# Altium PCB SensorHub_V1_2.PcbDoc (part 1 of 2)
Units mm, origin at the board's own origin, x right, y up, seen from the top; angles counter-clockwise.
Board outline 62.99 x 68.83 mm, 4 copper layers (Top Layer, Int1, Int2, Bottom Layer), stack 1.369 mm thick; 108 components, 90 nets, 414 pads, 145 vias.
Unrouted connection lines stored in the file: 31.
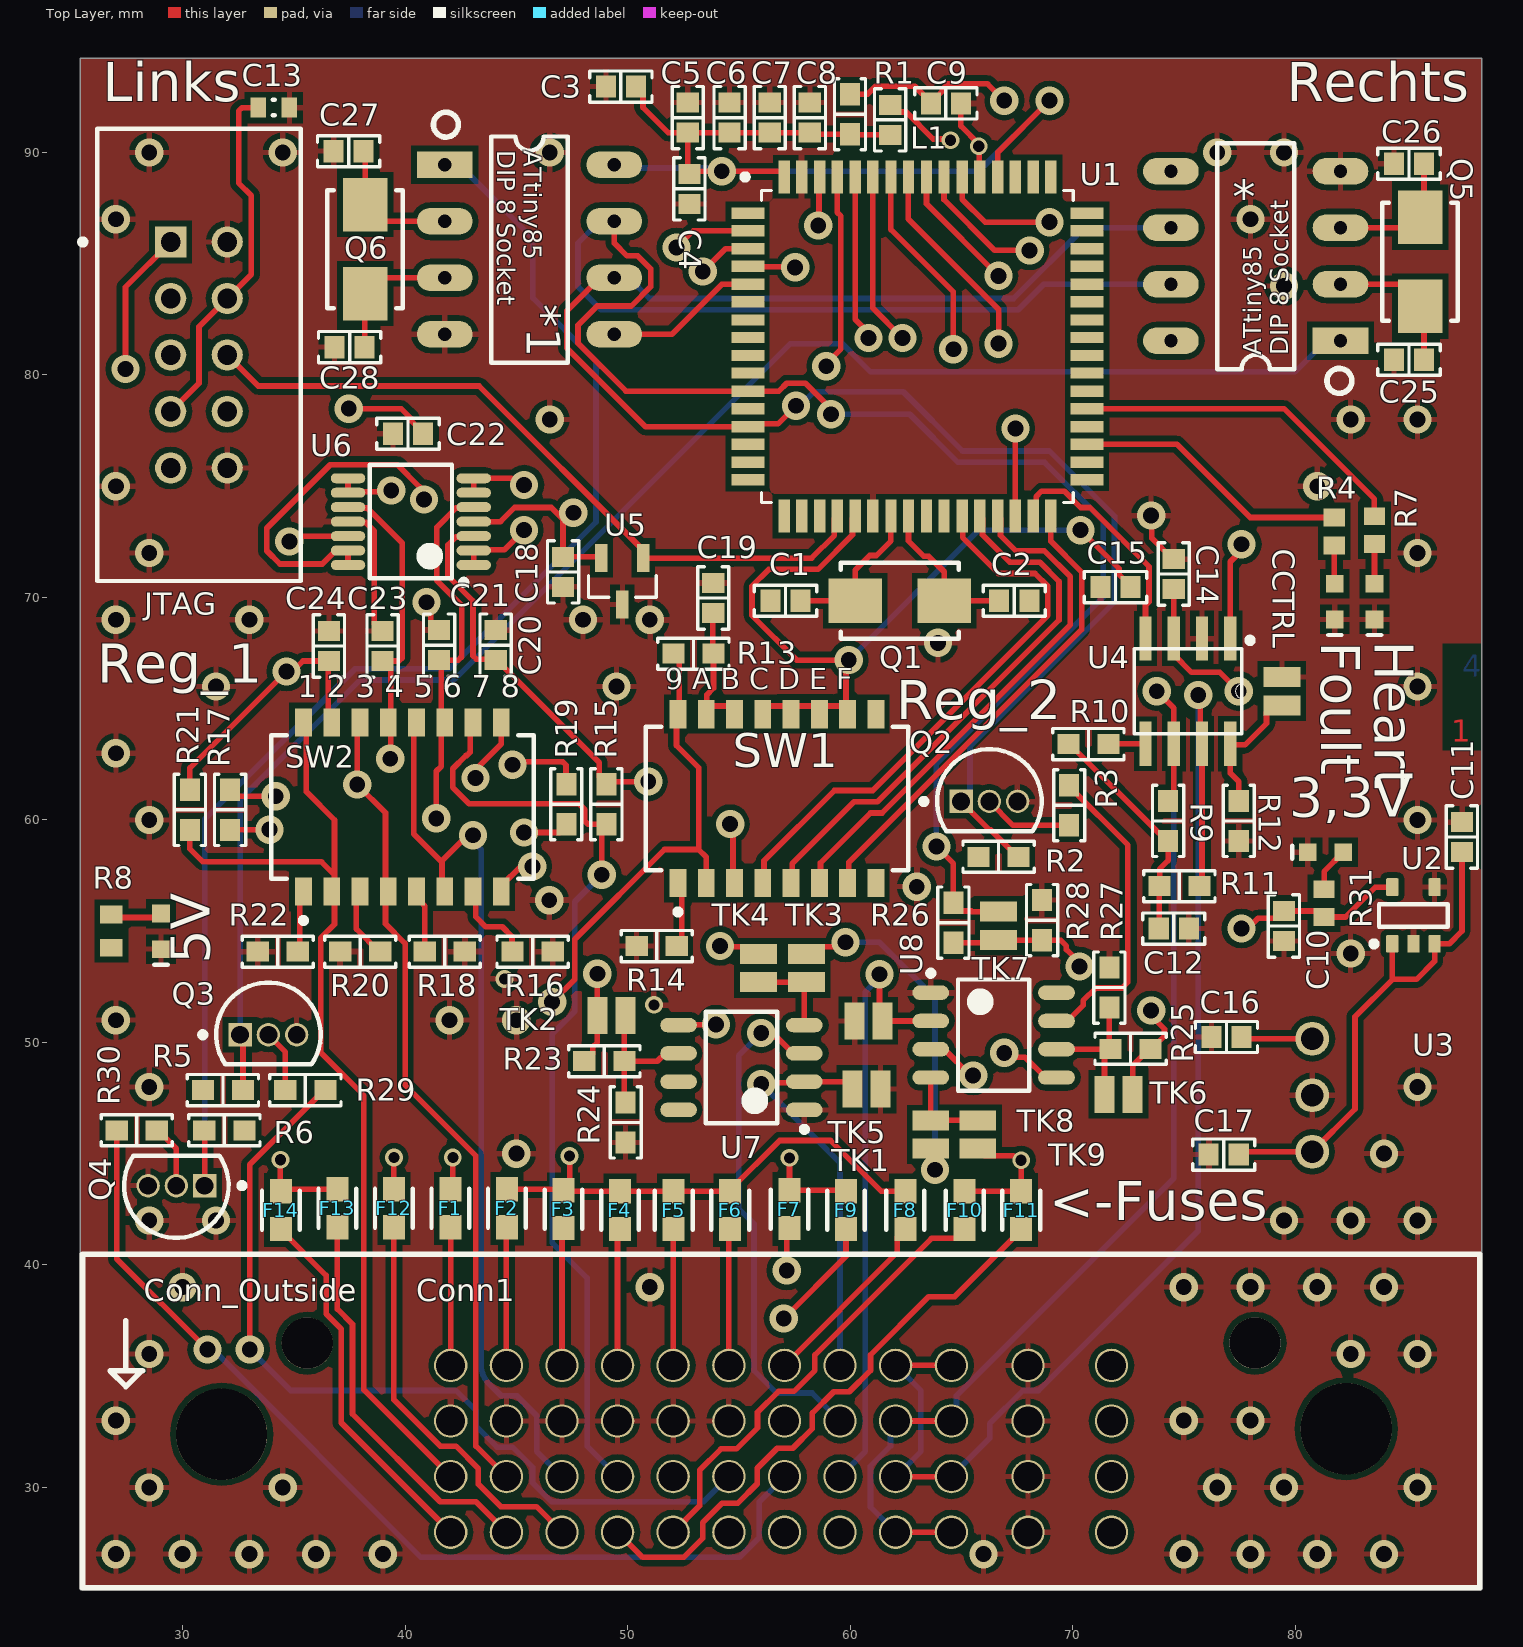
[diagram p0: Top Layer view]
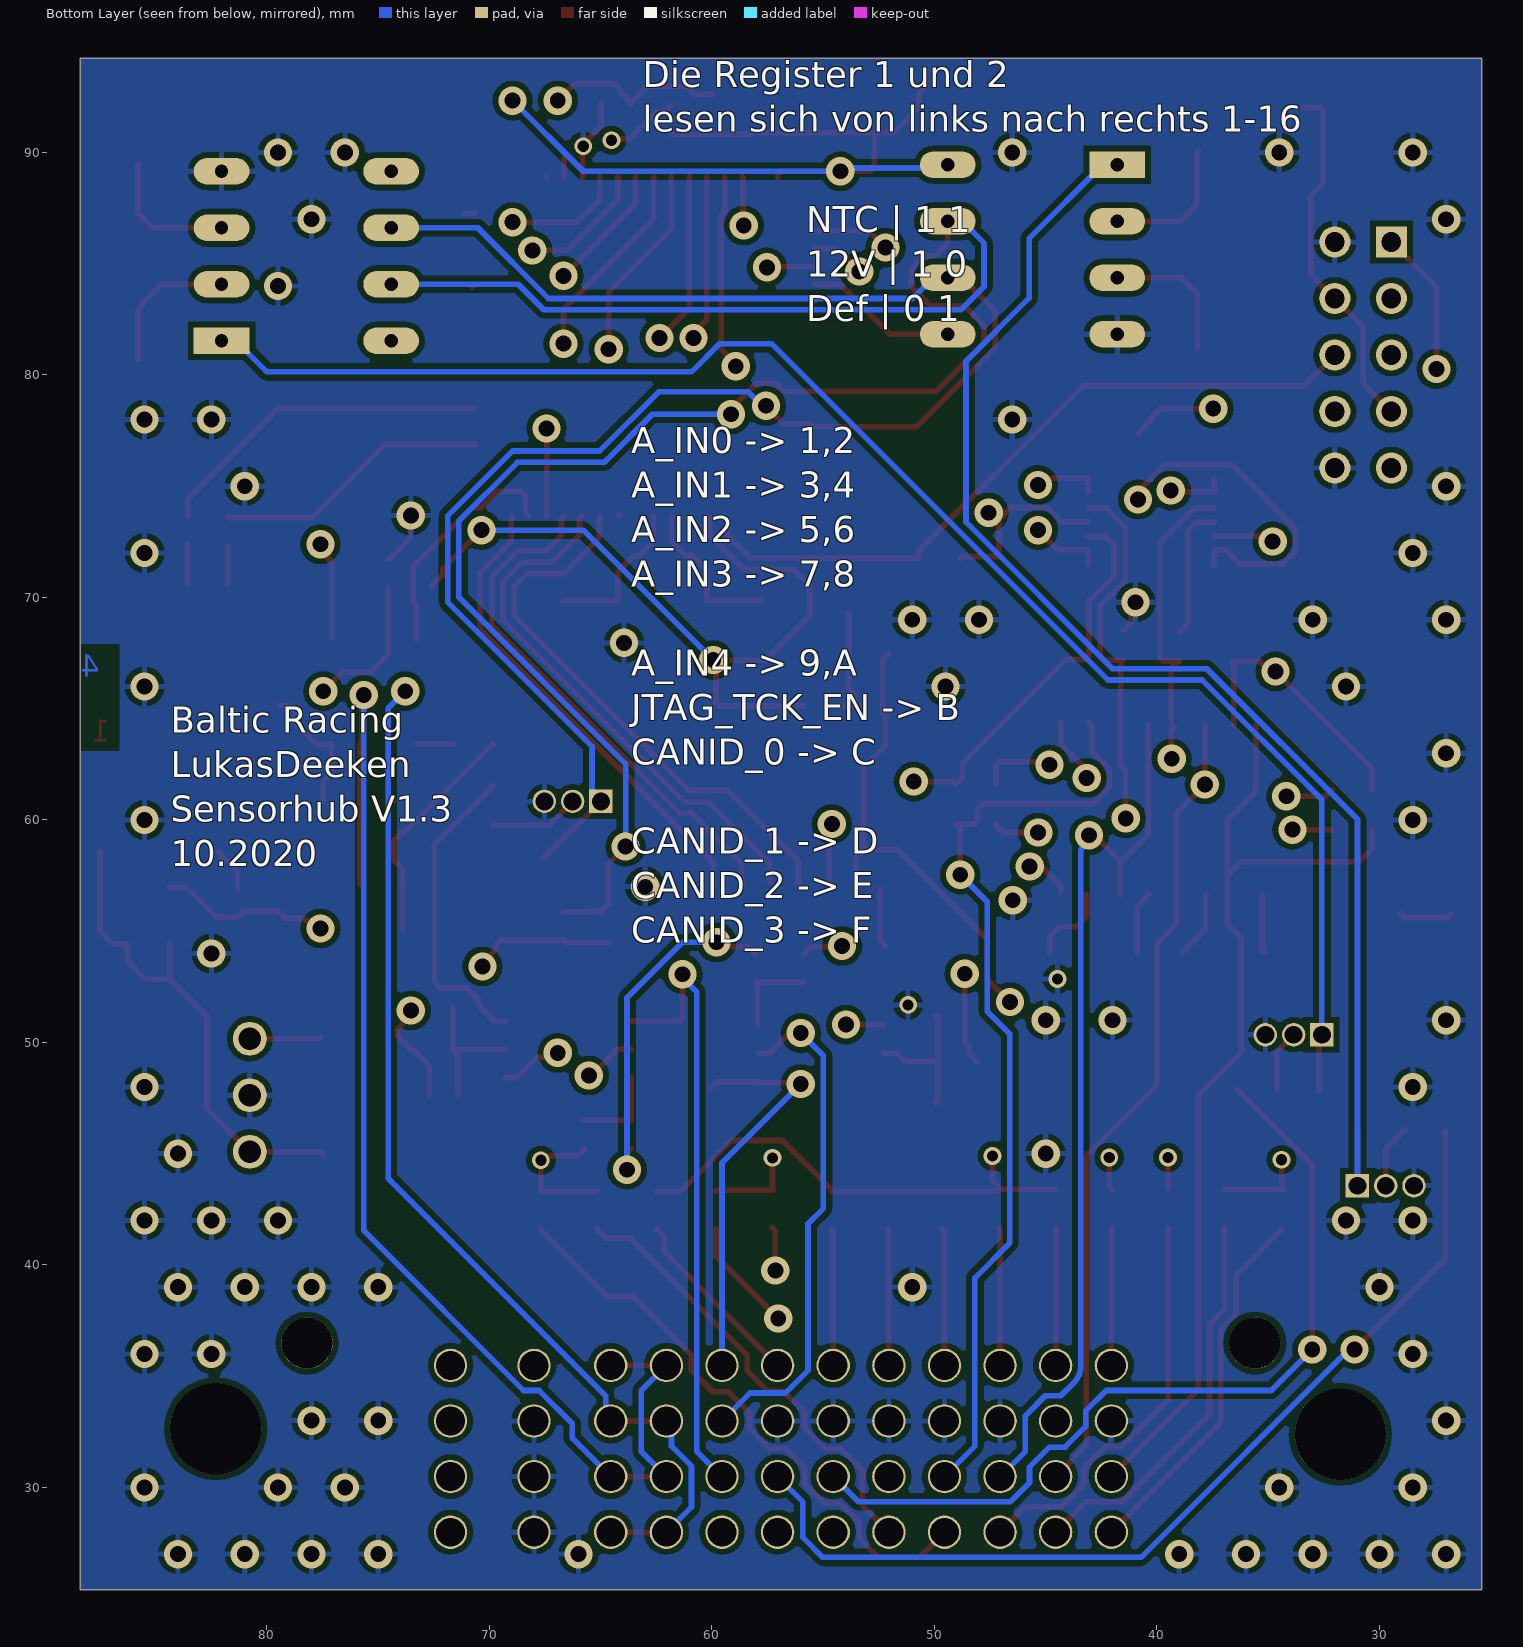
[diagram p1: Bottom Layer view, seen from below]
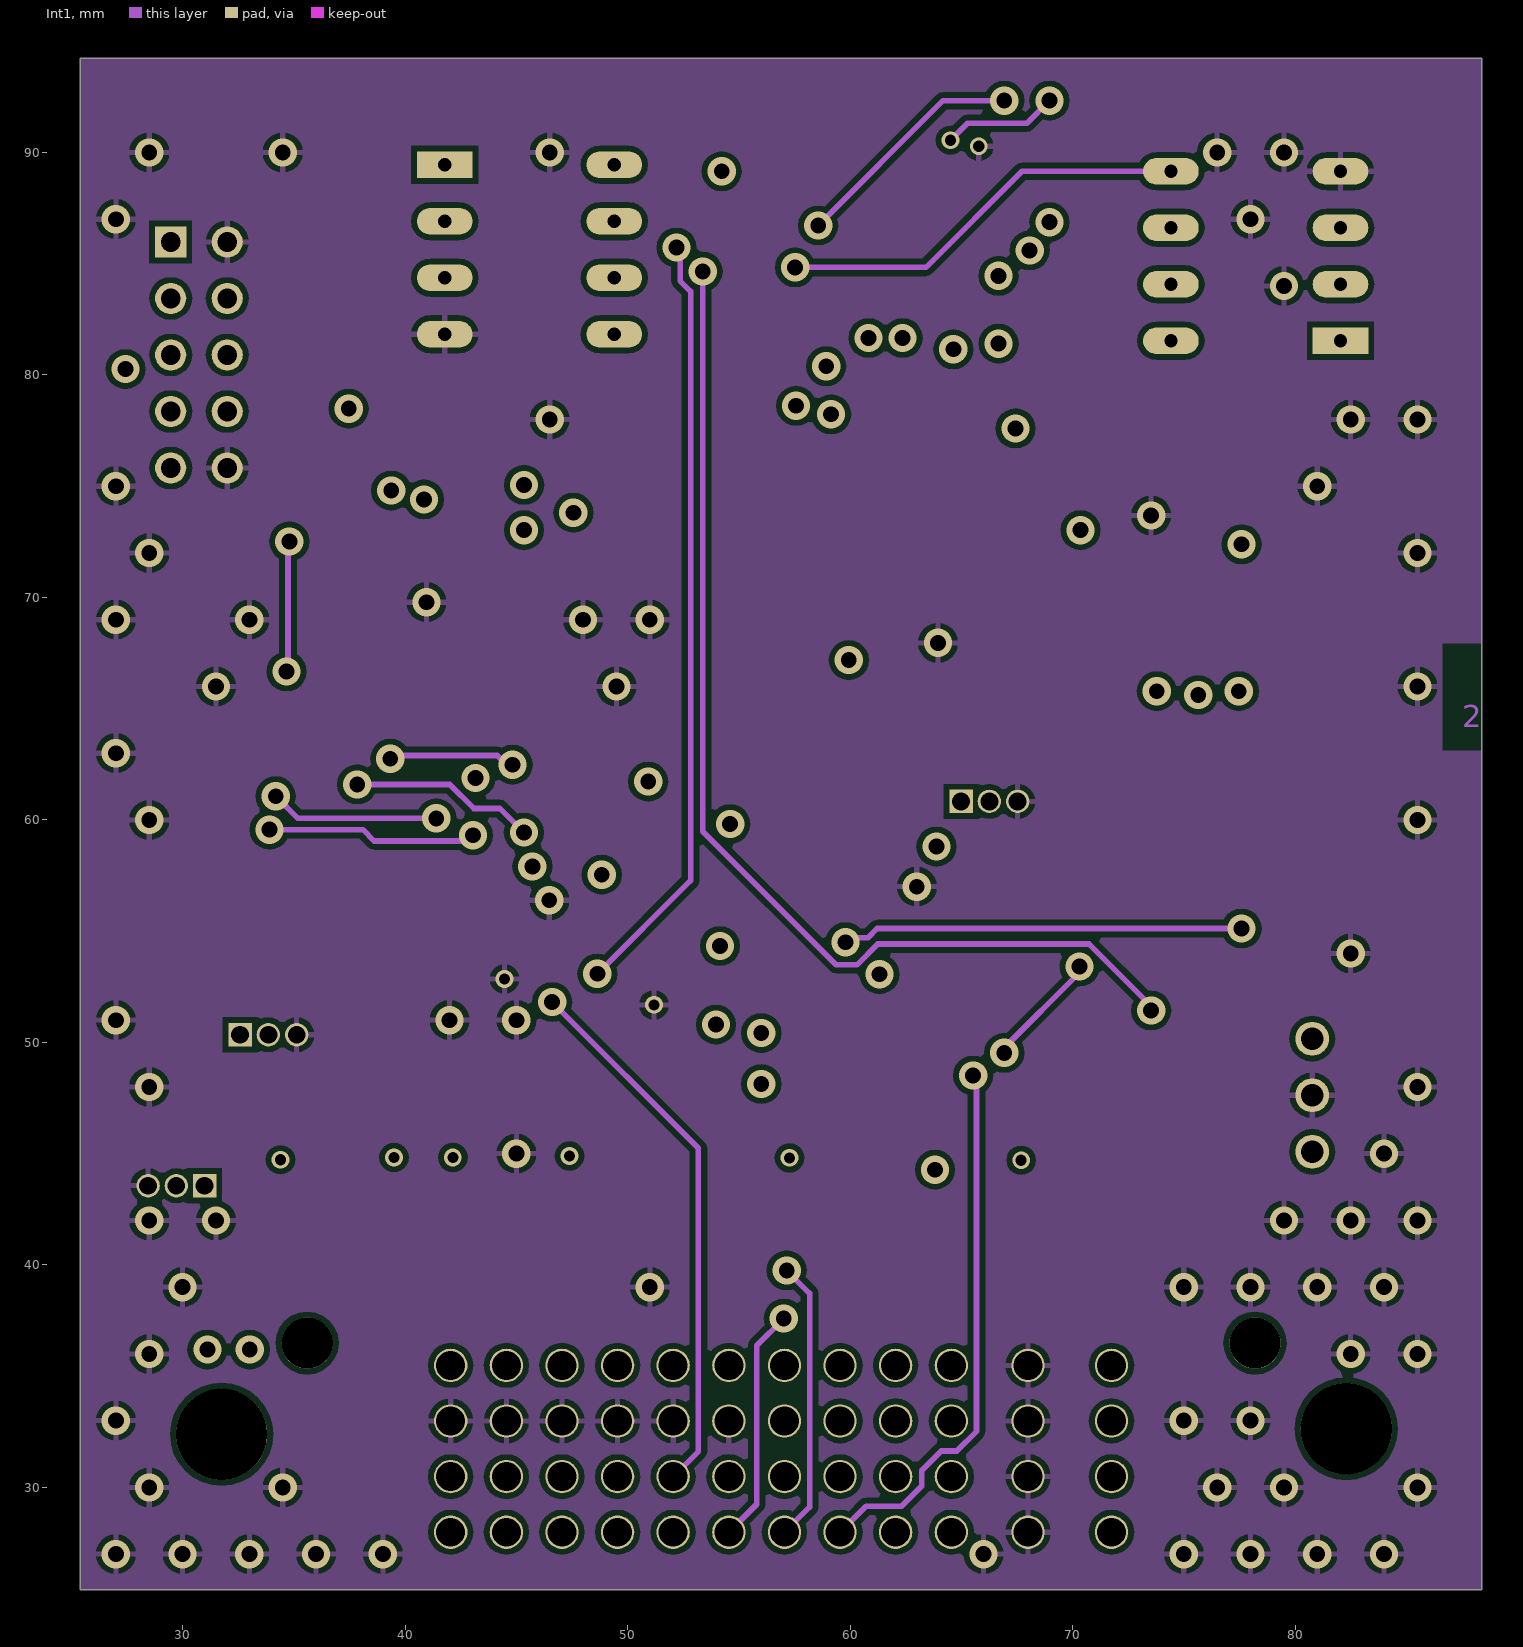
[diagram p2: Int1]
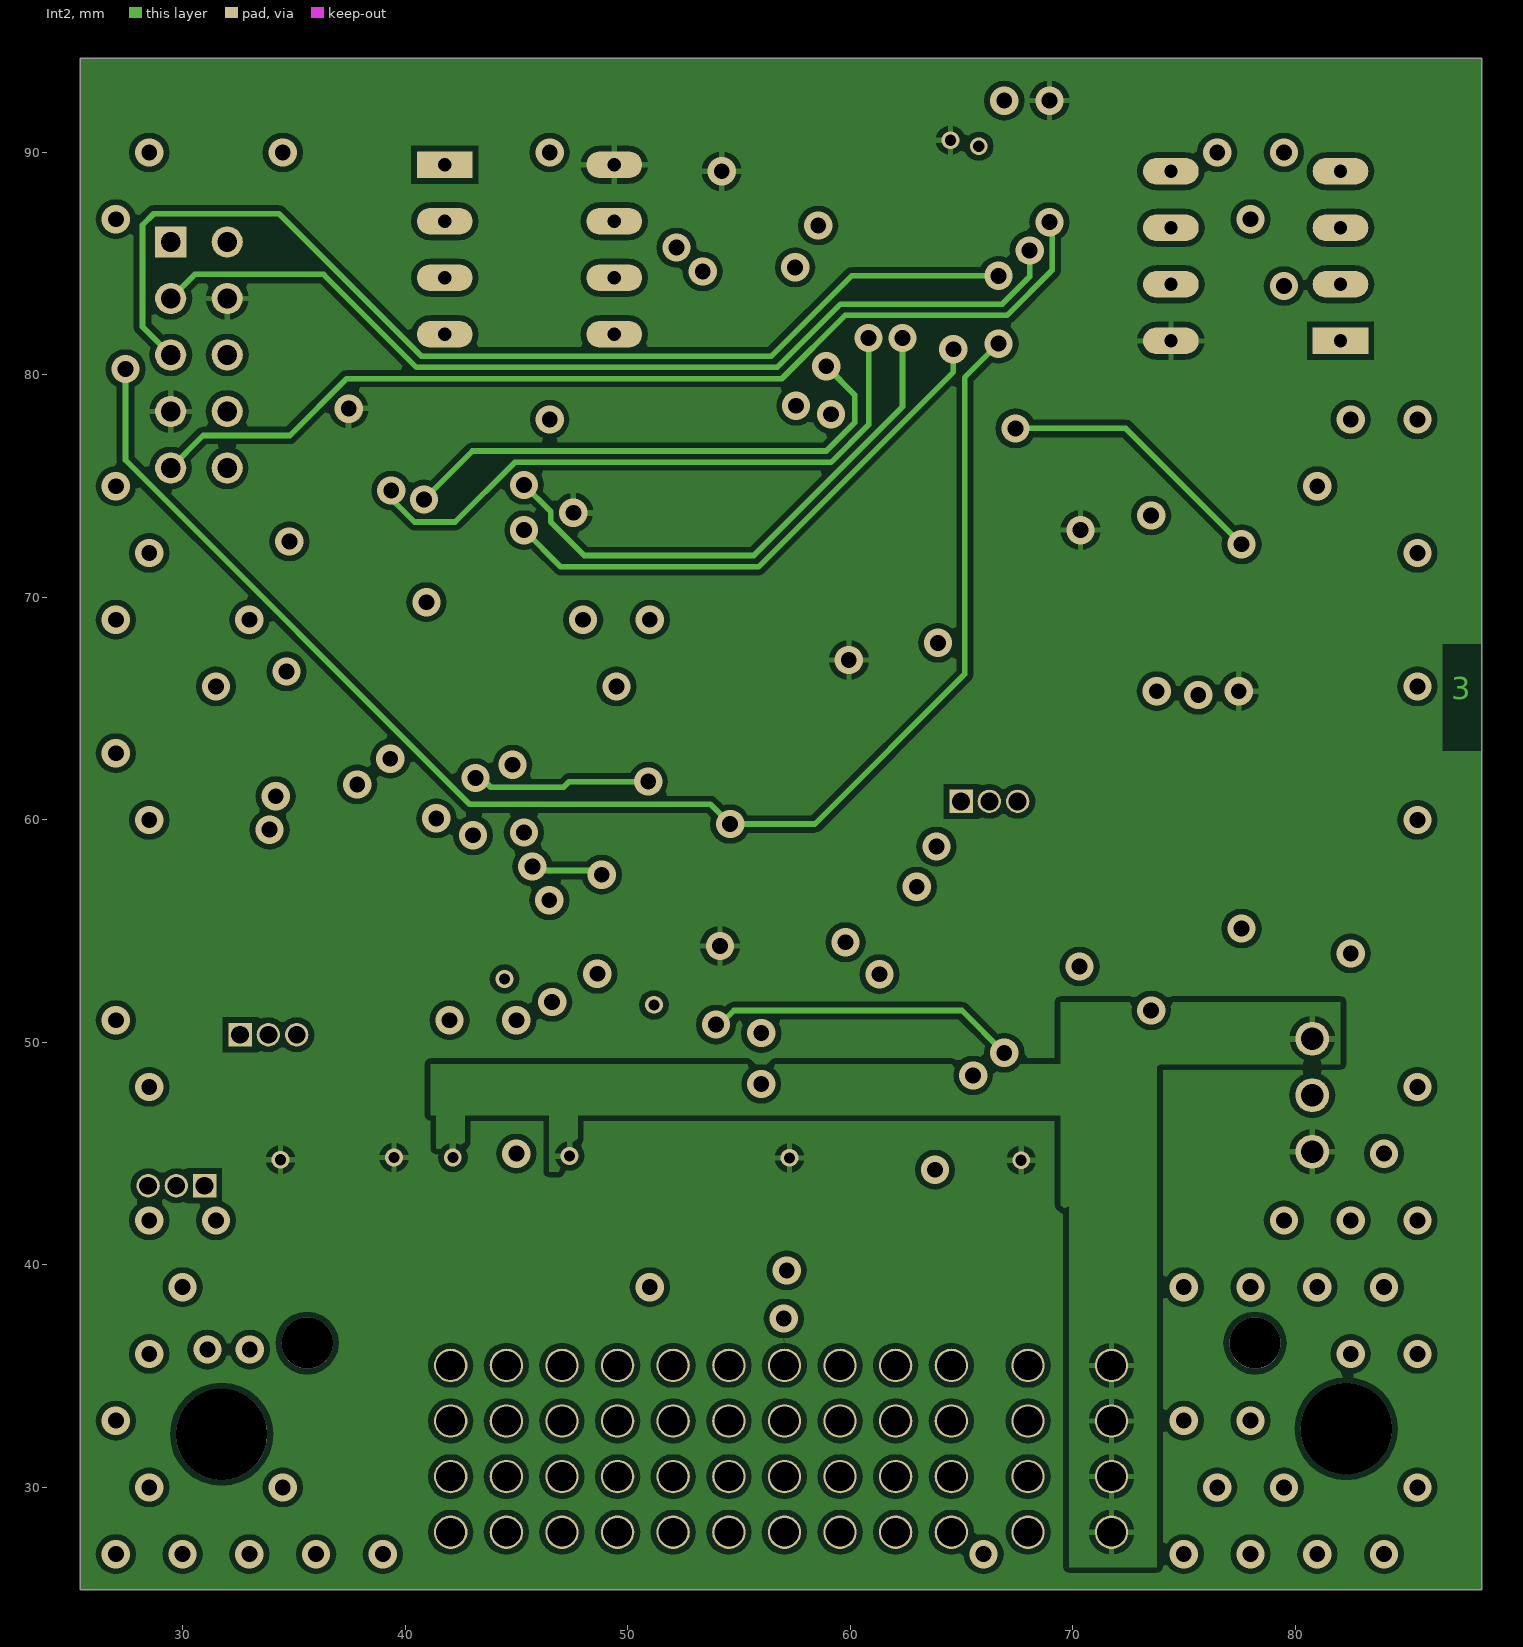
[diagram p3: Int2]
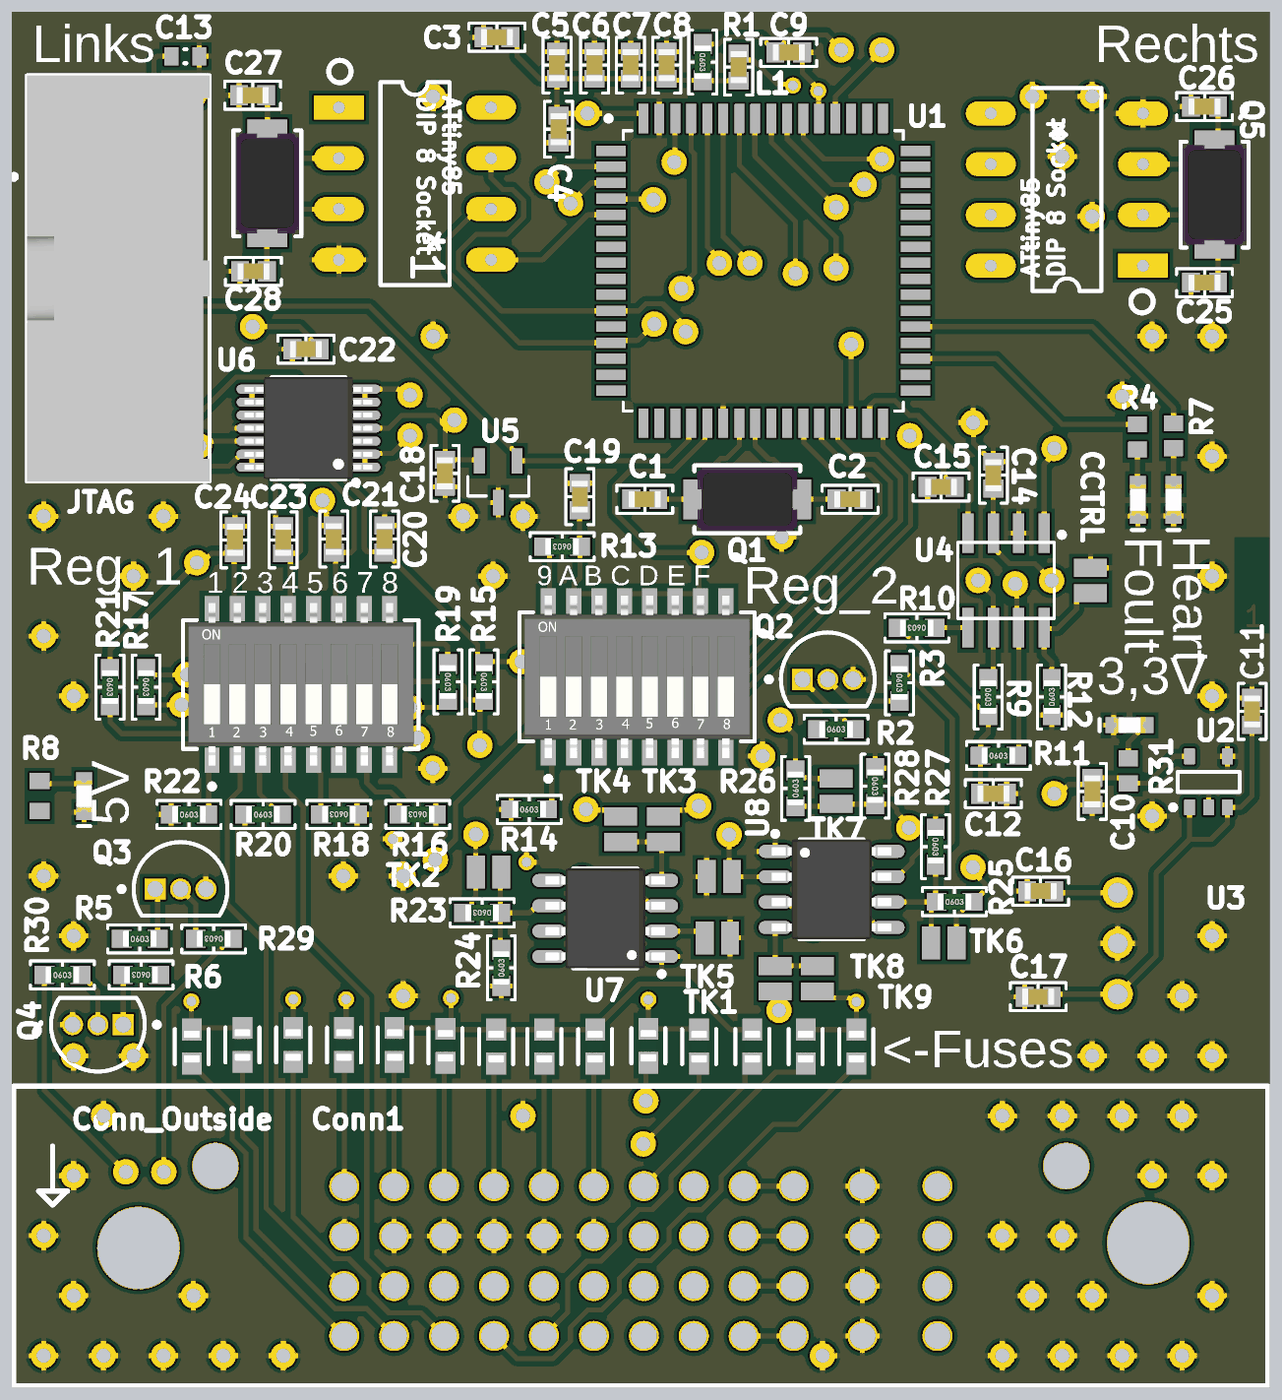
[diagram p4: 3D render of the assembled board from above, using the file's embedded part models]

## Layer stack, top to bottom
Top Solder: solder mask 0.0254, SM-001, Dk 4
Top Layer: signal copper 0.035
Dielectric 1: prepreg 0.1295, PP-017, Dk 4.3
Dielectric 2: prepreg 0.1295, PP-017, Dk 4.3
Int1: signal copper 0.035
Dielectric 3: core 0.7112, Core-039, Dk 4.8
Int2: signal copper 0.035
Dielectric 4: prepreg 0.1295, PP-017, Dk 4.3
Dielectric 5: prepreg 0.1295, PP-017, Dk 4.3
Bottom Layer: signal copper 0.035
Bottom Solder: solder mask 0.0254, SM-001, Dk 4

## Board outline
25.4,25.4 88.392,25.4 88.392,94.234 25.4,94.234

## Design rules (kind name [scope] priority, off if disabled: settings)
Clearance [All] p1: gap=0.254 ignorepadtopadclearanceinfootprint=FALSE except(0: Arc-Hole Track-Hole SMDPad-Hole THPad-Hole Via-Hole Fill-Hole Poly-Hole Region-Hole Text-Hole)
PolygonConnect [All] p1: connectstyle=Relief reliefconductorwidth=0.254 reliefentries=4 polygonreliefangle="90 Angle" airgapwidth=0.254
RoutingVias [All] p1: holewidth=0.711 width=1.27 viastyle="Through Hole" minholewidth=0.711 minwidth=1.27 maxholewidth=0.711 maxwidth=1.27
SolderMaskExpansion [All] p1: expansion=0.102 istentingtop=FALSE
Width [All] p1: maxlimit=0.254 minlimit=0.254 preferedwidth=0.254
30 further rules are at their usual default settings.

## Classes and differential pairs
component class Digital_Input: 1 *1 C25 C26 C27 C28 Q3 Q4 Q5 Q6 R5 R6 R29 R30
component class Connector: Conn1 F1 F2 F3 F4 F5 F6 F7 F8 F9 F10 F11 F12 F13 F14
component class TYPK: R23 R24 R25 R26 R27 R28 TK1 TK2 TK3 TK4 TK5 TK6 TK7 TK8 TK9 U7 U8
component class main: 3,3V 5V C1 C2 C3 C4 C5 C6 C7 C8 C9 C10 C11 C12 C13 C14 C15 C16 C17 C18 CCTRL Foult Heart JTAG L1 Q1 Q2 R1 R2 R3 R4 R7 R8 R9 R10 R11 R12 R31 U1 U2 U3 U4 U5
component class "analog filterung": C19 C20 C21 C22 C23 C24 R13 R14 R15 R16 R17 R18 R19 R20 R21 R22 U6

## Components (designator, comment, footprint, x,y, rotation, side; value= is the part's Value field where it differs from the comment)
3,3V "150060BS75000" 0603_A 81.369,58.547 r0 top
5V "150060GS75000" 0603_A 29.03,54.991 r90 top
* "Aries 08-3518-10 ATtiny85" "DIP8 0.3 Center" 82.042,81.534 r180 top
*1 "Aries 08-3518-10 ATtiny85" "DIP8 0.3 Center" 41.783,89.449 r0 top
C1 "SMD Capacitor" "CAP 0603/1608" 57.097,69.85 r0 top
C2 "SMD Capacitor" "CAP 0603/1608" 67.38,69.85 r180 top
C3 "SMD Capacitor" "CAP 0603/1608" 49.697,92.964 r0 top
C4 "SMD Capacitor" "CAP 0603/1608" 52.779,88.363 r90 top
C5 "SMD Capacitor" "CAP 0603/1608" 52.705,91.567 r270 top
C6 "SMD Capacitor" "CAP 0603/1608" 54.584,91.567 r270 top
C7 "SMD Capacitor" "CAP 0603/1608" 56.388,91.567 r90 top
C8 "SMD Capacitor" "CAP 0603/1608" 58.192,91.567 r90 top
C9 "SMD Capacitor" "CAP 0603/1608" 64.305,92.202 r0 top
C10 "SMD Capacitor 1uF" "CAP 0603/1608" 79.502,55.231 r90 top value=1uF
C11 "SMD Capacitor 1uF" "CAP 0603/1608" 87.503,59.235 r270 top value=1uF
C12 "SMD Capacitor" "CAP 0603/1608" 74.549,55.118 r0 top value=4,7u
C13 "CAP 100nF 10V 0603(1608)" CAPC0603(1608)100_L 34.098,92.013 r0 top value=100nF
C14 "SMD Capacitor" "CAP 0603/1608" 74.548,71.053 r270 top
C15 "SMD Capacitor" "CAP 0603/1608" 71.93,70.466 r0 top
C16 "SMD Capacitor" "CAP 0603/1608" 76.916,50.243 r0 top
C17 "SMD Capacitor" "CAP 0603/1608" 76.795,44.958 r0 top
C18 "SMD Capacitor" "CAP 0603/1608" 47.098,71.147 r270 top
C19 "SMD Capacitor" "CAP 0603/1608" 53.848,69.977 r270 top
C20 "SMD Capacitor" "CAP 0603/1608" 44.069,67.858 r270 top
C21 "SMD Capacitor" "CAP 0603/1608" 41.529,67.858 r270 top
C22 "SMD Capacitor" "CAP 0603/1608" 40.132,77.36 r180 top
C23 "SMD Capacitor" "CAP 0603/1608" 38.989,67.818 r270 top
C24 "SMD Capacitor" "CAP 0603/1608" 36.576,67.818 r270 top
C25 "SMD Capacitor" "CAP 0603/1608" 85.123,80.686 r0 top
C26 "SMD Capacitor" "CAP 0603/1608" 85.123,89.494 r0 top
C27 "SMD Capacitor" "CAP 0603/1608" 37.465,90.059 r0 top
C28 "SMD Capacitor" "CAP 0603/1608" 37.505,81.251 r0 top
CCTRL "SMD Jumper open" SMD-JUMPER-OPEN 79.413,65.786 r270 top (schematic designator CCTRL1)
Conn1 "Molex48PIN" PCBComponent_1 71.75,35.485 r0 top
F1 "0603SFS100F/32-2" FP-0603SFS-MFG 42.037,42.545 r270 top value=0.2Ω
F2 "0603SFS100F/32-2" FP-0603SFS-MFG 44.577,42.545 r270 top value=0.2Ω
F3 "0603SFS100F/32-2" FP-0603SFS-MFG 47.117,42.507 r270 top value=0.2Ω
F4 "0603SFS100F/32-2" FP-0603SFS-MFG 49.657,42.463 r270 top value=0.2Ω
F5 "0603SFS100F/32-2" FP-0603SFS-MFG 52.07,42.463 r270 top value=0.2Ω
F6 "0603SFS100F/32-2" FP-0603SFS-MFG 54.61,42.463 r270 top value=0.2Ω
F7 "0603SFS100F/32-2" FP-0603SFS-MFG 57.277,42.507 r90 top value=0.2Ω
F8 "0603SFS100F/32-2" FP-0603SFS-MFG 62.484,42.463 r270 top value=0.2Ω
F9 "0603SFS100F/32-2" FP-0603SFS-MFG 59.817,42.463 r90 top value=0.2Ω
F10 "0603SFS100F/32-2" FP-0603SFS-MFG 65.151,42.463 r90 top value=0.2Ω
F11 "0603SFS100F/32-2" FP-0603SFS-MFG 67.691,42.463 r90 top value=0.2Ω
F12 "0603SFS100F/32-2" FP-0603SFS-MFG 39.497,42.545 r90 top value=0.2Ω
F13 "0603SFS100F/32-2" FP-0603SFS-MFG 36.957,42.545 r90 top value=0.2Ω
F14 "0603SFS100F/32-2" FP-0603SFS-MFG 34.417,42.463 r90 top value=0.2Ω
Foult "150060BS75000" 0603_A 81.788,69.812 r90 top
Heart "150060BS75000" 0603_A 83.569,69.812 r90 top
JTAG "5103309-1" TECO-5103309-1_V 30.734,80.899 r90 top (schematic designator JTAG1)
L1 "SMD Capacitor" "CAP 0603/1608" 61.801,91.467 r90 top
Q1 "16M" "NDK NX5032GA" 62.23,69.85 r180 top
Q2 "BC547B" ONSC-TO-92-3-29-11 66.261,60.833 r0 top
Q3 "BC547B" ONSC-TO-92-3-29-11 33.855,50.344 r0 top
Q4 "BC547B" ONSC-TO-92-3-29-11 29.718,43.561 r180 top
Q5 "16M" "NDK NX5032GA" 85.623,85.09 r90 top
Q6 "16M" "NDK NX5032GA" 38.202,85.655 r270 top
R1 "SMD Resistor" "STACKPOLE CSR0603" 59.997,91.717 r270 top
R2 "SMD Resistor" "STACKPOLE CSR0603" 66.675,58.344 r0 top value="10k 0603"
R3 "SMD Resistor" "STACKPOLE CSR0603" 69.85,60.657 r270 top value="10k 0603"
R4 "CRCW0603130KFKEA" RESC1609X50X30NL10T20 81.762,72.966 r270 top
R5 "SMD Resistor" "STACKPOLE CSR0603" 31.813,47.855 r0 top value="10k 0603"
R6 "SMD Resistor" "STACKPOLE CSR0603" 31.877,46.05 r180 top value="10k 0603"
R7 "CRCW0603130KFKEA" RESC1609X50X30NL10T20 83.566,73.025 r270 top
R8 "RC0603FR-07100RL" RESC1608X55X25ML10T15 26.797,55.003 r90 top
R9 "SMD Resistor" "STACKPOLE CSR0603" 74.295,59.955 r270 top value="60 0603"
R10 "SMD Resistor" "STACKPOLE CSR0603" 70.716,63.412 r180 top value="300 0603"
R11 "SMD Resistor" "STACKPOLE CSR0603" 74.803,57.023 r0 top value="60 0603"
R12 "SMD Resistor" "STACKPOLE CSR0603" 77.47,59.955 r90 top
R13 "SMD Resistor" "STACKPOLE CSR0603" 52.959,67.473 r180 top
R14 "SMD Resistor" "STACKPOLE CSR0603" 51.308,54.332 r0 top
R15 "SMD Resistor" "STACKPOLE CSR0603" 49.048,60.706 r270 top
R16 "SMD Resistor" "STACKPOLE CSR0603" 45.731,54.078 r180 top
R17 "SMD Resistor" "STACKPOLE CSR0603" 32.131,60.452 r270 top
R18 "SMD Resistor" "STACKPOLE CSR0603" 41.783,54.078 r180 top
R19 "SMD Resistor" "STACKPOLE CSR0603" 47.244,60.706 r270 top
R20 "SMD Resistor" "STACKPOLE CSR0603" 37.983,54.078 r0 top
R21 "SMD Resistor" "STACKPOLE CSR0603" 30.327,60.452 r270 top
R22 "SMD Resistor" "STACKPOLE CSR0603" 34.279,54.078 r0 top
R23 "SMD Resistor" "STACKPOLE CSR0603" 48.956,49.156 r180 top value="10K 0603"
R24 "SMD Resistor" "STACKPOLE CSR0603" 49.914,46.401 r90 top value="18K 0603"
R25 "SMD Resistor" "STACKPOLE CSR0603" 72.606,49.712 r0 top value="10K 0603"
R26 "SMD Resistor" "STACKPOLE CSR0603" 64.643,55.383 r90 top value="10K 0603"
R27 "SMD Resistor" "STACKPOLE CSR0603" 71.656,52.466 r270 top value="18K 0603"
R28 "SMD Resistor" "STACKPOLE CSR0603" 68.631,55.496 r270 top value="18K 0603"
R29 "SMD Resistor" "STACKPOLE CSR0603" 35.518,47.855 r180 top value="10k 0603"
R30 "SMD Resistor" "STACKPOLE CSR0603" 27.94,46.05 r0 top value="10k 0603"
R31 "CRCW0603130KFKEA" RESC1609X50X30NL10T20 81.306,56.261 r90 top
SW1 "1-1571983-1" FP-1-1571983-1-MFG 56.712,60.96 r0 top
SW2 "1-1571983-1" FP-1-1571983-1-MFG 39.878,60.579 r0 top
TK1 "SMD Jumper open" SMD-JUMPER-OPEN 60.734,47.904 r180 top
TK2 "SMD Jumper open" SMD-JUMPER-OPEN 49.276,51.206 r180 top
TK3 "SMD Jumper open" SMD-JUMPER-OPEN 58.039,53.34 r270 top
TK4 "SMD Jumper open" SMD-JUMPER-OPEN 55.88,53.34 r270 top
TK5 "SMD Jumper open" SMD-JUMPER-OPEN 60.833,50.964 r0 top
TK6 "SMD Jumper open" SMD-JUMPER-OPEN 72.068,47.662 r0 top
TK7 "SMD Jumper open" SMD-JUMPER-OPEN 66.675,55.245 r90 top
TK8 "SMD Jumper open" SMD-JUMPER-OPEN 63.627,45.863 r90 top
TK9 "SMD Jumper open" SMD-JUMPER-OPEN 65.734,45.863 r90 top
U1 "AT90CAN128-16AI" *QFP80P1600X1600X120-64N 63.03,81.28 r0 top
U2 "TPS78330DDCT" DDC0005A_L 85.324,55.706 r90 top
U3 "R-78E05-1.0" SIP3_RECOM 83.022,47.625 r270 top
U4 "MCP2551/2561" *SOIC127P600X175-8N 75.184,65.786 r270 top
U5 "MCP130T-450I/TT" *SOT95P237X112-3N 49.765,70.726 r180 top
U6 "ADA4084-4ARUZ" ANALOG_RU14 40.259,73.406 r180 top
U7 "MAX31855KASA+/MAX6675" SOIC8 55.118,48.874 r180 top value=Value
U8 "MAX31855KASA+/MAX6675" SOIC8 66.452,50.329 r0 top value=Value

## Footprints (in the part's own frame and the unit in brackets; to place one, negate y for a bottom-side part, rotate by r counter-clockwise, add the part's x,y. Pads: shape width x height; smd on the part's side, far side on the other; paste and mask are expansions set on the pad)
0603_A [mm] "Chip LED, 2-Leads, Body 1.6x0.8mm, IPC Medium Density"
  rect 0.8x0.8 smd: 1(-0.8,0) 2(0.8,0)
  silkscreen extent -1.5,-0.3 -1.5,0.3, body extent -0.8,-0.4 0.8,0.4, height 0.7
*QFP80P1600X1600X120-64N [mil]
  rect 58x20 smd: 1(-300,236) 2(-300,205) 3(-300,173) 4(-300,142) 5(-300,110) 6(-300,79) 7(-300,47) 8(-300,16) 9(-300,-16) 10(-300,-47) 11(-300,-79) 12(-300,-110) 13(-300,-142) 14(-300,-173) 15(-300,-205) 16(-300,-236) 33(300,-236) 34(300,-205) 35(300,-173) 36(300,-142) 37(300,-110) 38(300,-79) 39(300,-47) 40(300,-16) 41(300,16) 42(300,47) 43(300,79) 44(300,110) 45(300,142) 46(300,173) 47(300,205) 48(300,236)
  rect 20x58 smd: 17(-236,-300) 18(-205,-300) 19(-173,-300) 20(-142,-300) 21(-110,-300) 22(-79,-300) 23(-47,-300) 24(-16,-300) 25(16,-300) 26(47,-300) 27(79,-300) 28(110,-300) 29(142,-300) 30(173,-300) 31(205,-300) 32(236,-300) 49(236,300) 50(205,300) 51(173,300) 52(142,300) 53(110,300) 54(79,300) 55(47,300) 56(16,300) 57(-16,300) 58(-47,300) 59(-79,300) 60(-110,300) 61(-142,300) 62(-173,300) 63(-205,300) 64(-236,300)
  silkscreen extent -310,-276 276,305, body extent -270,-270 270,270, height 30
*SOIC127P600X175-8N [mil]
  rect 78x22 smd: 1(-93,75) 2(-93,25) 3(-93,-25) 4(-93,-75) 5(93,-75) 6(93,-25) 7(93,25) 8(93,75)
  silkscreen extent -95,-95 75,115, body extent -75,-95 75,95, height 80
*SOT95P237X112-3N [mil]
  rect 22x50 smd: 1(-37,-41) 2(37,-41) 3(0,41)
  silkscreen extent -60,-10 60,28, body extent -60,-25 60,25, height 50
ANALOG_RU14 [mm] "Analog Devices 14-Lead Thin Shrink Small Outline Package [TSSOP]"
  oval 1.55x0.45 smd: 1(-2.825,1.95) 2(-2.825,1.3) 3(-2.825,0.65) 4(-2.825,0) 5(-2.825,-0.65) 6(-2.825,-1.3) 7(-2.825,-1.95) 8(2.825,-1.95) 9(2.825,-1.3) 10(2.825,-0.65) 11(2.825,0) 12(2.825,0.65) 13(2.825,1.3) 14(2.825,1.95)
  silkscreen extent -2.5,-2.55 1.85,2.85, body extent -3.2,-2.55 3.2,2.55, height 1.2
"CAP 0603/1608" [mm] "Chip Capacitor, 2-Leads, Body 1.60x0.80mm, IPC Medium Density"
  rect 0.9x1 smd: 1(-0.675,0) 2(0.675,0)
  silkscreen extent -1.4,-0.7 1.4,0.7, body extent -0.8,-0.41 0.8,0.41, height 0.82
CAPC0603(1608)100_L [mm] "Chip Capacitor, Body 1.6x0.8mm, Height 1.0mm, IPC High Density"
  rect 0.7x0.9 smd: 1(-0.7,0) 2(0.7,0)
  silkscreen extent -0.05,-0.35 0.05,0.35, body extent -0.87,-0.47 0.88,0.48, height 1
DDC0005A_L [mm] "SOT23, 5-Leads, Body 3.05x1.75mm, Pitch 0.95mm, IPC High Density"
  rrect18% 0.8x0.55 smd: 1(-1.275,0.95) 2(-1.275,0) 3(-1.275,-0.95) 4(1.275,-0.95) 5(1.275,0.95)
  silkscreen extent -1.4,-1.55 0.5,1.9, body extent -0.88,-1.52 0.87,1.53, height 1.1
"DIP8 0.3 Center" [mm]
  rect 2.5x1.2 hole 0.6: 1(0,0)
  oval 2.5x1.2 hole 0.6: 2(0,-2.54) 3(0,-5.08) 4(0,-7.62) 5(7.62,-7.62) 6(7.62,-5.08) 7(7.62,-2.54) 8(7.62,0)
  silkscreen extent -0.51,-8.89 5.54,2.36
FP-1-1571983-1-MFG [mm]
  rect 0.76x1.27 smd paste+0 mask+0: 1(-4.445,-3.795) 2(-3.175,-3.795) 3(-1.905,-3.795) 4(-0.635,-3.795) 5(0.635,-3.795) 6(1.905,-3.795) 7(3.175,-3.795) 8(4.445,-3.795) 9(4.445,3.795) 10(3.175,3.795) 11(1.905,3.795) 12(0.635,3.795) 13(-0.635,3.795) 14(-1.905,3.795) 15(-3.175,3.795) 16(-4.445,3.795)
  silkscreen extent -5.89,-5.22 5.89,3.22, body extent -5.99,-4.53 5.99,4.53, height 0.25
FP-0603SFS-MFG [mil]
  rect 43x39 smd paste+0 mask+0: 1(-33.5,0) 2(33.5,0)
  silkscreen extent -34,-33 34,33, body extent -59,-23 59,23, height 10
"NDK NX5032GA" [mm] "Crystal, 2-Leads, Body 5.00x3.20mm, IPC Medium Density"
  rect 2.4x2 smd: 1(-2,0) 2(2,0)
  silkscreen extent -2.65,-1.7 2.65,1.7, body extent -2.5,-1.6 2.5,1.6, height 1.2
ONSC-TO-92-3-29-11 [mm] "TO, 3-Leads, Body Dia 4.7mm, Pitch 1.27mm"
  rect 1.05x1.05 hole 0.8: 1(-1.27,0)
  round 1.05 hole 0.8: 2(0,0) 3(1.27,0)
  silkscreen extent -3.07,-1.34 2.35,2.35, body extent -2.35,-1.33 2.36,2.36, height 7.87
PCBComponent_1 [mm]
  round 1.5 hole 1.3: 1(-29.7,0) 2(-27.2,0) 3(-24.7,0) 4(-22.2,0) 5(-19.7,0) 6(-17.2,0) 7(-14.7,0) 8(-12.2,0) 9(-9.7,0) 10(-7.2,0) 11(-3.75,0) 12(0,0) 13(-29.7,-2.5) 14(-27.2,-2.5) 15(-24.7,-2.5) 16(-22.2,-2.5) 17(-19.7,-2.5) 18(-17.2,-2.5) 19(-14.7,-2.5) 20(-12.2,-2.5) 21(-9.7,-2.5) 22(-7.2,-2.5) 23(-3.75,-2.5) 24(0,-2.5) 25(-29.7,-5) 26(-27.2,-5) 27(-24.7,-5) 28(-22.2,-5) 29(-19.7,-5) 30(-17.2,-5) 31(-14.7,-5) 32(-12.2,-5) 33(-9.7,-5) 34(-7.2,-5) 35(-3.75,-5) 36(0,-5) 37(-29.7,-7.5) 38(-27.2,-7.5) 39(-24.7,-7.5) 40(-22.2,-7.5) 41(-19.7,-7.5) 42(-17.2,-7.5) 43(-14.7,-7.5) 44(-12.2,-7.5) 45(-9.7,-7.5) 46(-7.2,-7.5) 47(-3.75,-7.5) 48(0,-7.5)
  round 4.1 hole 4.1: 50(-40,-3.1) 50(10.55,-2.85)
  round 2.3 hole 2.3: 50(-36.15,1) 50(6.45,1)
  silkscreen extent -46.25,-10 16.55,5
RESC1608X55X25ML10T15 [mm] "Chip Resistor, 2-Leads, Body 1.60x0.80mm, IPC Low Density"
  rect 0.8x1 smd: 1(-0.75,0) 2(0.75,0)
  body extent -0.85,-0.45 0.85,0.45, height 0.55
RESC1609X50X30NL10T20 [mm] "Chip Resistor, 2-Leads, Body 1.55x0.85mm, IPC Medium Density"
  rect 0.8x0.95 smd: 1(-0.625,0) 2(0.625,0)
  body extent -0.82,-0.48 0.82,0.48, height 0.5
SIP3_RECOM [mm]
  round 1.524 hole 1: 1(-2.54,-2.25) 2(0,-2.25) 3(2.54,-2.25)
  body extent -5.75,-4.25 5.75,4.25, height 10.4
SMD-JUMPER-OPEN [mm] "Jumper, SMD"
  rect 0.9x1.65 smd: 1(-0.635,0) 2(0.635,0)
SOIC8 [mm] "SOIC, 8-Leads, Body 4,90x3,90mm, Pitch 1,27mm, IPC Low Density"
  oval 1.65x0.65 smd: 1(-2.825,1.905) 2(-2.825,0.635) 3(-2.825,-0.635) 4(-2.825,-1.905) 5(2.825,-1.905) 6(2.825,-0.635) 7(2.825,0.635) 8(2.825,1.905)
  silkscreen extent -2.95,-2.5 1.6,2.9, body extent -3,-2.5 3,2.5, height 1.75
"STACKPOLE CSR0603" [mm] "Chip Resistor, 2-Leads, Body 1.60x0.80mm, IPC Medium Density"
  rect 1x0.9 smd: 1(-0.9,0) 2(0.9,0)
  silkscreen extent -1.6,-0.7 1.6,0.7, body extent -0.85,-0.4 0.85,0.4, height 0.45
TECO-5103309-1_V [mm] "Male Header, 10-Leads, Body 20.32x9.144mm, Pitch 2.54mm"
  rect 1.4x1.4 hole 0.889: 1(5.08,1.27)
  round 1.4 hole 0.889: 2(5.08,-1.27) 3(2.54,1.27) 4(2.54,-1.27) 5(0,1.27) 6(0,-1.27) 7(-2.54,1.27) 8(-2.54,-1.27) 9(-5.08,1.27) 10(-5.08,-1.27)
  silkscreen extent -10.16,-4.57 10.16,5.35, body extent -10.16,-4.57 10.16,4.57, height 9.85

## Part data
3,3V Foult Heart: library part CMP-1426-00003-1, "SMD mono-color Chip LED, WL-SMCW, Blue", Color=Blue, Manufacturer="Wuerth Elektronik", ComponentLink1Description="Manufacturer URL", ComponentLink1URL=http://www.we-online.com, ComponentLink2Description=Datasheet, ComponentLink2URL=http://katalog.we-online.com/led/datasheet/150060BS75000.pdf, PackageReference=0603_A, PartNumber=150060BS75000
5V: library part CMP-1426-00002-1, "SMD mono-color Chip LED, WL-SMCW, Green", Color=Green, Manufacturer="Wuerth Elektronik", ComponentLink1Description="Manufacturer URL", ComponentLink1URL=http://www.we-online.com, ComponentLink2Description=Datasheet, ComponentLink2URL=http://katalog.we-online.com/led/datasheet/150060GS75000.pdf, PackageReference=0603_A, PartNumber=150060GS75000
C1 C2 C3 C4 C5 C6 C7 C8 C9 C12 C14 C15 C16 C17 C18 C19 C20 C21 C22 C23 C24 C25 C26 C27 C28 L1: "Capacitor with multiple Footprints"
C10 C11: library part "SMD Capacitor", "Capacitor with multiple Footprints"
C13: library part CMP-1035-02579-1, "CAP 100nF 10V ±5% 0603 (1608 Metric) Thickness 1mm SMD", Case-EIA=0603, Case-Metric=1608, Rated Voltage="10 V", Tolerance=Â±5%, Max Thickness="1 mm", Technology=SMT
F1 F2 F3 F4 F5 F6 F7 F8 F9 F10 F11 F12 F13 F14: library part CMP-08605-000034-1, "0438003.WRGT", Fuse Current=1A, Fuse Interrupt Dc Current=50A, Manufacturer=Littelfuse, Max Fuse Dc Voltage=32V, Package=0603SFS, Resistance=0.2Ω, Temperature="-55°C to +125°C", Temperature Range High=+125°C, Temperature Range Low=-55°C, Automotive=No, Category=Fuse, ComponentLink2Description=Datasheet, ComponentLink2URL=https://www.littelfuse.com/~/media/electronics/datasheets/fuses/littelfuse_fuse_sfs_datasheet.pdf.pdf, Device Class L1="Circuit Protection", Device Class L2=Fuses, Device Class L3=unset, Digikey Description="FUSE BOARD MOUNT 1A 32VDC 0603", Fuse Blow Speed=Slow, Fuse I2T=0.093A2Sec, Height=0.95mm, Ipc Land Pattern Name=CAPC16080X80, Lead Free=Yes, Manufacturer Part Number=0603SFS100F/32-2, Octopart=https://octopart.com/0603sfs100f%2F32-2-littelfuse-74214378, RoHS=TRUE, Voltage Rating=32V
JTAG: library part CMP-2000-07502-1, "Male Header, Pitch 2.54 mm, 2 x 5 Position, Height 9.855 mm, Tail Length 3.048 mm, -65 to 105 degC, RoHS, Tube", Colour=Black, Current Rating=1A, Flammability Rating=UL94V-0, Insulation Resistance=5GR, Manufacturer="TE Connectivity", Max Operating Temperature=105degC, Min Operating Temperature=-65degC, Package Description="Male Header, Pitch 2.54 mm, 2 x 5 Position, Height 9.855 mm, Tail Length 3.048 mm", Package Quantity=35, Board Standoff=Yes(With), Body Material=Thermoplastic, Connector System=Wire-to-Board, Connector Type=Header, Contact Gender=Male, Contact Material=CopperAlloy, Contact Mating Length=0.24inch, Contact Plating=Gold, Contact Shape=Square, Datasheet URL=http://www.te.com/commerce/DocumentDelivery/DDEController?Action=showdoc&DocId=Customer+Drawing%7F5103309%7FE1%7Fpdf%7FEnglish%7FENG_CD_5103309_E1.pdf%7F5103309-1, Datasheet Version="Rev. E1, 03/2011", Depth=9.14mm, ELV=Compliant, Gender=Male, Height=8.813mm, Housing Colour=Black, Housing Material=PBT, Lead Free=LeadFree, Length=0.8inch, Manufacturer URL=http://www.te.com/, Mating Alignment=Yes(With), Mating Connector Lock=No(Without), Mating Retention=No(Without), Max Current Rating=1A, Mount=ThroughHole, Mounting Technology=ThroughHole, Number of Contacts=10, Number of Positions=10, Number of Rows=2, Orientation=Straight, Package Reference=5103309-1, Packaging=Rail/Tube, Panel Mount Retention=No(Without), PCB Mount Alignment=No(Without), PCB Mount Retention=Without, PCB Mounting Orientation=Vertical, Pitch=2.54mm, REACH SVHC=NoSVHC, RoHSCompliant=True, Row Spacing=2.54mm, Shrouded=Yes(With), Shrouded End Dimension=3.81mm, Termination=ThroughHole, Termination Post Length=0.12inch
Q1 Q5 Q6: library part "16 MHz Quartz", "16 MHz Quartz"
Q2 Q3 Q4: library part CMP-1048-01467-1, "Amplifier Transistor, NPN Silicon, 3-Pin TO-92, Bulk Box", Manufacturer="On Semiconductor", ComponentLink1Description="Manufacturer URL", ComponentLink1URL=http://www.onsemi.com/, ComponentLink2Description=Datasheet, ComponentLink2URL=http://www.onsemi.com/pub_link/Collateral/BC546-D.PDF, ComponentLink3Description="Package Specification", ComponentLink3URL=http://www.onsemi.cn/pub_link/Collateral/2N6426-D.PDF, DatasheetVersion="Rev. 7", fT Min (MHz)=150, IC Continuous (A)=0.1, Mounting Technology="Through Hole", PackageDescription="3-Pin Transistor Outline, Body 4.825 x 3.685 mm, Pitch 1.27 mm", PackageReference=TO-92-3-29-11_AM_SL, PackageVersion="Rev. AM", Packing="Bulk Box", PartNumber=BC547B, Polarity=NPN, RoHS=FALSE
R1 R2 R3 R5 R6 R9 R10 R11 R12 R13 R14 R15 R16 R17 R18 R19 R20 R21 R22 R23 R24 R25 R26 R27 R28 R29 R30: "Resistor with multiple footprints"
R4 R7 R31: library part CMP-2000-03887-1, Manufacturer="Vishay Dale", Part Number=CRCW0603130KFKEA
R8: library part CMP-2100-03663-1, "Chip Resistor, 100 Ohm, +/- 1%, 0.1 W, -55 to 155 degC, 0603 (1608 Metric), RoHS, Tape and Reel", Case Code (Imperial)=0603, Case Code (Metric)=1608, Manufacturer=Yageo, Max Operating Temperature=155degC, Min Operating Temperature=-55degC, Package Description="2-Pin Surface Mount Device, Body 1.6 x 0.8 mm", Power Rating=100mW, Resistance=100Ohm, Temperature Coefficient=100ppm/degreesC, Tolerance=1%, Voltage Rating=50V, Case/Package=0603, Composition=ThickFilm, Datasheet URL=http://www.yageo.com/NewPortal/yageodocoutput?fileName=/pdf/R-Chip/PYu-RC_Group_51_RoHS_L_5.pdf, Datasheet Version="Rev. 5, 10/2016", Depth=0.8mm, Height=0.45mm, Lead Free=LeadFree, Length=1.6mm, Manufacturer URL=http://www.yageo.com/, Military Standard=Not, Number of Pins=2, Package Reference=0603, Packaging=TapeandReel, REACH SVHC=Unknown, RoHSCompliant=true, Termination=SMD/SMT, Voltage Rating (DC)=50V, Width=0.8mm
SW1 SW2: library part CMP-03400-000003-1, "SWITCH SLIDE DIP SPST 25MA 24V", Contact Current Rating=25mA, Contact Resistance=100mΩ, Manufacturer="TE Connectivity", Temperature="-30°C to +85°C", Temperature Range High=+85°C, Temperature Range Low=-30°C, Voltage Rating Dc=50V, Automotive=No, Category=Switch, ComponentLink2Description=Datasheet, ComponentLink2URL=https://www.te.com/commerce/DocumentDelivery/DDEController?Action=showdoc&DocId=Catalog+Section%7F1308111-1_SWITCHES_CORE_PROGRAM_CATALOG%7F0308%7Fpdf%7FEnglish%7FENG_CS_1308111-1_SWITCHES_CORE_PROGRAM_CATALOG_0308.pdf%7F1-1571983-1, Device Class L1=Electromechanical, Device Class L2=Switches, Device Class L3="DIP Switches", Digikey Description="SWITCH SLIDE DIP SPST 25MA 24V", Electromechanical Life=1000Cycles, Footprint Url=https://www.te.com/commerce/DocumentDelivery/DDEController?Action=showdoc&DocId=Customer+Drawing%7F1571983%7FC6%7Fpdf%7FEnglish%7FENG_CD_1571983_C6.pdf%7F1-1571983-1, Height=2.56mm, Lead Free=Yes, Manufacturer Part Number=1-1571983-1, Mount="Surface Mount", Mouser Description="Switch DIP OFF ON SPST 8 Recessed Rocker 0.025A 24VDC Gull Wing 1.27mm SMD T/R", Number Of Circuits=8, Octopart=https://octopart.com/1-1571983-1-te+connectivity-40115518, Package=1-1571983-1, RoHS=TRUE, Standoff Height=0mm, Throw Configuration=SPST
U1: "Ic Mcu 8bit 128kb Flash 64tqfp", Package="TQFP-64 Microchip", Availability=Unavailable, MF=Microchip, MP=AT90CAN128-16AI, Price=None, SnapEDA_Link=https://www.snapeda.com/parts/AT90CAN128-16AI/Microchip/view-part/?ref=snap
U2: library part CMP-0394-01077-2, "Single Output LDO, 150 mA, Fixed 3 V Output, 2.2 to 5.5 V Input, with Ultra-Low IQ, 5-pin SOT (DDC), -40 to 105 degC, Green (RoHS & no Sb/Br)", Manufacturer="Texas Instruments", Rating=Catalog, Accuracy(%)=3, Code_JEDEC=MO-193, ComponentLink1Description="Manufacturer URL", ComponentLink1URL=http://www.ti.com/, ComponentLink2Description=Datasheet, ComponentLink2URL=http://www.ti.com/general/docs/lit/getliterature.tsp?genericPartNumber=TPS78330&fileType=pdf, ComponentLink3Description="Package Specification", ComponentLink3URL=http://www.ti.com/litv/pdf/mpds123d, DatasheetVersion=SBVS133, Eco-Plan="Green (RoHS & no Sb/Br)", Fixed Output Options(V)=3, Iout(Max)(A)=0.15, Iq(Typ)(mA)=0.0005, Mounting Technology="Surface Mount", PackageDescription="5-Pin Plastic Small Outline, Body 2.9 x 1.6 mm, 0.95 mm Pitch", PackageReference=DDC0005A, PackageVersion=4204403-2/E, PartNumber=TPS78330DDCT, SubFamily="Single Channel LDO", Vdo(Typ)(mV)=130, Vin(Max)(V)=5.5, Vin(Min)(V)=2.2, Vout Adj(Max)(V)=3, Vout Adj(Min)(V)=3
U3: "Nonisolated 5V Switchmode converter"
U4: library part MCP2551-I/SN, "MCP2551 Series 5.5 V 1 Mb/s Surface Mount High-Speed CAN Transceiver - SOIC-8", Package="SOIC-8 Microchip", Availability=Unavailable, MF=Microchip, MP=MCP2551-I/SN, Price=None, SnapEDA_Link=https://www.snapeda.com/parts/MCP2551-I/SN/Microchip/view-part/?ref=snap
U5: "System Supervisors - Power Supply Monitors with Reset Generators Open Drain Low", Package="SOT-23-3 Microchip", Availability=Unavailable, MF=Microchip, MP=MCP120T-450I/TT, Price=None, SnapEDA_Link=https://www.snapeda.com/parts/MCP120T-450I/TT/Microchip/view-part/?ref=snap
U6: "30 V, Low Noise, Rail-to-Rail Input/Output, Low Power Operational Amplifiers"
U7 U8: library part MAX31855KASA+, "No Description Available", Built_By=EMA_UL_Team, Copyright="Copyright (C) 2018 Accelerated Designs. All rights reserved", Manufacturer_Part_Number=MAX31855KASA+, RefDes=RefDes, Type=DEV, Vendor="Maxim Integrated Products"

## Via types
v1: diameter 1.27, hole 0.711, Top Layer to Bottom Layer, 135 vias
v2: diameter 0.8, hole 0.5, Top Layer to Bottom Layer, 10 vias

## Nets (pads, with @x,y where several pads share a name; then routed paths per layer and width w, separated by ;. In a path a pad name is that pad's centre, name@x,y a point inside that pad or via, vN(x,y) a via of type N, cw(c..) or ccw(c..) an arc to the next point about the centre after c; other vN are vias at no path point)
3,3V: C10.2 R31.1 TK3.1 TK8.1 U2.5 | length 41.6
  Top Layer w0.254: TK3.1 58.362,54.298 59.317,54.298 59.522,54.503 v1(59.797,54.503) ; TK8.1 63.817,45.037 v1(63.817,44.279) ; v1(77.597,55.118) 77.872,55.118 78.337,55.583 79.179,55.583 C10.2 81.036,55.906 R31.1 82.267,55.636 83.612,56.981 U2.5
  Int1 w0.254: v1(59.797,54.503) 59.991,54.697 60.797,54.697 61.218,55.118 v1(77.597,55.118)
  Bottom Layer w0.254: v1(59.797,54.503) 61.321,54.503 63.817,52.006 v1(63.817,44.279)
+5V: *1.8 *.8 C3.2 C4.2 C5.2 C6.2 C7.1 C8.1 C11.2 C13.1 C14.2 C15.2 C17.2 C18.1 C22.1 F7.2 F9.2 F10.2 F11.2 F12.2 F13.2 F14.2 JTAG.4 JTAG.7 L1.1 L1.2 R1.2 R2.1 R5.1 R6.1 R8.1 SW1.10 SW1.11 SW1.12 SW1.13 TK4.1 TK9.1 U1.21 U1.52 U1.64 U2.1 U2.3 U3.3 U4.3 U5.2 U6.4 | length 162.5
  Top Layer w0.254: JTAG.7 30.734,79.629 30.734,82.169 33.085,84.52 33.085,88.064 32.518,88.631 32.518,91.864 32.667,92.013 C13.1 ; v2(34.394,44.727) 34.394,43.455 34.335,43.396 F13.2 ; v1(37.465,78.486) 39.82,78.486 40.288,78.018 40.288,77.929 40.807,77.41 C22.1 ; F12.2 v2(39.497,44.831) ; U6.4 44.287,73.406 44.922,74.041 46.571,74.041 v1@47.098,73.514 ; v1(47.563,73.809) 47.393,73.809 v1@47.098,73.514 ; U5.2 48.771,71.822 C18.1 v1@47.098,73.514 ; C3.2 50.695,92.641 50.695,92.021 51.824,90.892 C5.2 ; v1(54.152,54.333) 54.187,54.298 55.557,54.298 TK4.1 ; SW1.13@55.88,65.121 59.69,65.121 59.817,65.248 59.817,67.056 59.69,67.183 57.601,67.183 55.591,69.192 55.591,70.508 56.343,71.259 58.552,71.259 60.109,72.816 60.109,73.533 U1.21 ; U1.64 57.035,89.027 56.908,89.154 52.896,89.154 52.705,89.345 C5.2 ; v2(57.277,44.812) F7.2 59.773,43.358 F9.2 ; L1.1 60.022,90.792 R1.2 58.267,90.817 C8.1 C5.2 ; L1.2 62.124,91.819 62.524,91.819 63.735,90.608 64.459,90.608 v2(64.516,90.551) ; F10.2 F11.2 v2(67.691,44.704) 67.543,44.704 67.342,44.905 66.057,44.905 TK9.1 ; U1.52 66.636,90.004 v1(68.961,92.329) ; v1(70.358,73.025) 72.087,71.296 72.087,71.035 72.605,70.516 C15.2 ; C14.2@74.549,70.377 74.549,67.437 75.354,66.632 76.624,66.632 v1(77.47,65.786) ; C17.2 77.597,45.085 U3.3 82.694,47.007 82.694,51.153 84.374,52.832 ; U2.1 84.374,52.832 ; C11.2 87.503,55.005 86.93,54.431 U2.3 86.274,53.65 85.455,52.832 84.374,52.832
  Int1 w0.254: v2(64.516,90.551) 65.278,91.313 67.945,91.313 v1(68.961,92.329)
  Bottom Layer w0.254: *1.8 49.55,89.301 54.082,89.301 v1(54.229,89.154) 65.786,89.154 v1(68.961,92.329) ; v1(59.944,67.183) 65.786,73.025 v1(70.358,73.025)
+12V: C16.2 Conn1.12 Conn1.24 Conn1.36 Conn1.48 F1.1 F2.1 F3.1 F4.1 F5.1 F6.1 F8.1 U3.1 | length 26.1
  Top Layer w0.254: F1.1 42.145,43.504 v2(42.145,44.831) ; F2.1 47.013,43.396 47.394,43.777 v2(47.394,44.892) ; F3.1 47.161,43.314 F6.1 54.61,43.365 56.838,45.593 59.118,45.593 61.397,43.314 F8.1 ; C16.2 77.669,50.165 U3.1
Analog_in_0: Conn1.25 R21.2 SW2.2 SW2.16 | length 44.8
  Top Layer w0.254: R21.2 30.327,58.7 30.911,58.116 36.245,58.116 36.83,57.531 ; SW2.16@35.56,64.247 35.56,61.27 36.83,60 36.83,57.531 ; Conn1.25 38.147,34.388 38.147,47.614 36.202,49.559 36.202,54.686 36.83,55.313 36.83,57.531
Analog_in_0_Filtered: U1.61 U6.13 U6.14 | length 47.6
  Top Layer w0.254: U6.13@37.428,72.144 36.922,72.144 36.279,71.501 34.377,71.501 33.782,72.096 33.782,73.111 36.633,75.962 39.655,75.962 40.654,74.963 40.654,74.602 v1(40.849,74.407) ; U6.14 U6.13 ; v1(58.928,80.391) 58.928,80.515 59.584,81.171 59.584,87.138 59.423,87.3 U1.61
  Int2 w0.254: v1(40.849,74.407) 43.023,76.581 58.932,76.581 60.205,77.855 60.205,79.114 v1(58.928,80.391)
Analog_in_1: Conn1.26 R19.2 SW2.4 SW2.14 | length 47
  Top Layer w0.254: SW2.14@37.846,64.281 v1(37.846,61.595) 39.116,60.325 39.116,55.334 40.002,54.448 40.002,48.079 43.18,44.9 43.18,35.533 cw(c42.05,35.485) 43.18,35.437 43.18,33.033 cw(c42.05,32.985) 43.18,32.937 43.18,31.855 Conn1.26 ; v1(45.339,59.436) 46.921,59.436 47.244,59.759 R19.2
  Int1 w0.254: v1(37.846,61.595) 42.009,61.595 43.089,60.515 44.26,60.515 v1(45.339,59.436)
Analog_in_1_Filtered: U1.60 U6.8 U6.9 | length 38.1
  Top Layer w0.254: U6.8 U6.9 37.472,74.744 39.318,74.744 v1(39.377,74.803) ; U1.60 60.236,82.5 60.833,81.903 v1(60.833,81.661)
  Int2 w0.254: v1(39.377,74.803) 39.571,74.609 39.571,74.248 40.428,73.391 42.244,73.391 44.926,76.073 59.142,76.073 60.833,77.764 v1(60.833,81.661)
Analog_in_2: Conn1.27 R17.2 SW2.6 SW2.12 | length 52.1
  Top Layer w0.254: R17.2 32.142,59.563 v1(33.909,59.563) ; SW2.12@40.386,64.262 40.386,59.367 41.622,58.132 42.799,59.309 v1(43.053,59.309) ; SW2.6@41.656,56.672 41.656,58.166
  Int1 w0.254: v1(33.909,59.563) 38.1,59.563 38.608,59.055 42.524,59.055 42.778,59.309 v1(43.053,59.309)
  Bottom Layer w0.254: v1(43.053,59.309) 43.053,59.034 43.419,58.668 43.419,35.485 ccw(c44.55,35.485) 43.688,34.753 43.688,34.748 44.32,34.116 45.018,34.116 45.915,33.219 45.915,31.62 Conn1.27
Analog_in_2_Filtered: U1.59 U6.6 U6.7 | length 35.3
  Top Layer w0.254: U6.6 U6.7 44.773,75.356 45.072,75.057 v1(45.347,75.057) ; U1.59 61.023,82.998 v1(62.36,81.661)
  Int2 w0.254: v1(45.347,75.057) 46.547,73.856 46.547,73.388 48.053,71.882 55.67,71.882 62.36,78.572 v1(62.36,81.661)
Analog_in_3: Conn1.28 R15.2 SW2.8 SW2.10 | length 48.1
  Top Layer w0.254: SW2.10 43.038,64.374 42.926,64.262 42.926,63.047 42.777,62.899 42.738,62.899 42.143,62.303 42.143,61.462 42.879,60.725 47.814,60.725 48.075,60.464 48.075,59.955 48.224,59.806 R15.2 48.839,59.597 v1(48.839,57.539) ; SW2.8 44.323,57.039 45.241,57.957 45.526,57.957 45.57,57.912 v1(45.72,57.912)
  Int2 w0.254: v1(45.72,57.912) 45.907,57.725 48.653,57.725 v1(48.839,57.539)
  Bottom Layer w0.254: v1(48.839,57.539) 47.625,56.325 47.625,51.395 46.613,50.383 46.613,40.983 48.181,39.414 48.181,31.854 Conn1.28
Analog_in_3_Filtered: U1.58 U6.1 U6.2 | length 36.8
  Top Layer w0.254: U6.1 U6.2 43.122,72.144 44.461,72.144 v1(45.343,73.025) ; U1.58 61.836,86.54 64.643,83.733 v1(64.643,81.153)
  Int2 w0.254: v1(45.343,73.025) 46.994,71.374 55.88,71.374 64.643,80.137 v1(64.643,81.153)
Analog_in_4: Conn1.29 R13.2 SW1.2 SW1.16 | length 46
  Top Layer w0.254: v1(46.609,51.816) 47.625,52.832 47.625,54.64 51.659,58.674 53.191,58.674 ; R13.2 52.324,67.208 52.324,64.812 52.197,64.685 52.197,63.345 53.191,62.351 53.191,58.674 ; SW1.2 53.537,58.328 53.191,58.674
  Int1 w0.254: v1(46.609,51.816) 53.181,45.244 53.181,31.616 Conn1.29
Analog_in_4_Filtered: C19.2 R13.1 SW1.14 SW1.15 | length 5.7
  Top Layer w0.254: C19.2 53.828,69.282 53.828,67.504 R13.1 53.859,65.924 53.557,65.622 53.557,65.263 53.415,65.121 53.34,65.121 SW1.14@54.61,65.121
CANH: Conn1.9 Conn1.10 Conn1.33 Conn1.34 R11.2 U4.7 | length 59.8
  Top Layer w0.254: Conn1.33 Conn1.34 ; Conn1.9 Conn1.10 ; v1(75.647,65.614) 75.733,65.528 75.733,63.51 U4.7 75.819,57.139 R11.2
  Bottom Layer w0.254: Conn1.33 63.181,31.616 63.181,34.354 Conn1.9 ; Conn1.34 66.279,32.214 66.279,32.863 67.77,34.354 68.468,34.354 75.647,41.532 v1(75.647,65.614)
CANL: Conn1.21 Conn1.22 Conn1.45 Conn1.46 R9.1 U4.6 | length 53.5
  Top Layer w0.254: Conn1.45 Conn1.46 ; Conn1.21 Conn1.22 ; v1(73.787,65.786) 74.549,65.024 74.549,61.109 R9.1
  Bottom Layer w0.254: Conn1.45 60.919,29.116 60.919,30.953 61.82,31.854 61.82,32.755 Conn1.21 ; Conn1.22 64.78,33.215 64.78,34.116 74.549,43.885 74.549,65.024 v1(73.787,65.786)
CS_Digital_In_1/MOSI: *.5 U1.4 | length 20.8
  Top Layer w0.254: U1.4 55.435,84.861 57.506,84.861 v1(57.531,84.836)
  Int1 w0.254: v1(57.531,84.836) 63.411,84.836 67.729,89.154 *.5
CS_Digital_in_2/MOSI: *1.5 U1.5 | length 6.9
  Top Layer w0.254: *1.5 51.991,81.829 54.236,84.074 U1.5
CS_TYPK_1_5V: R23.2 TK2.2 U1.2 | length 42.4
  Top Layer w0.254: R23.2 48.106,49.156 48.429,49.479 48.429,49.788 48.641,50 v1(48.641,53.086) ; v1(52.197,85.725) 52.959,86.487 U1.2
  Int1 w0.254: v1(48.641,53.086) 52.832,57.277 52.832,83.758 52.36,84.23 52.36,85.562 v1(52.197,85.725)
CS_TYPK_2_5V: R25.2 TK6.2 U1.3 | length 56.7
  Top Layer w0.254: v1(53.376,84.651) 54.399,85.674 U1.3 ; TK6.2 72.703,48.959 73.456,49.712 R25.2@73.556,49.712 ; R25.2 R25.2@73.556,49.712 ; v1(73.533,51.435) 73.533,51.199 74.133,50.598 74.133,50.289 R25.2@73.556,49.712
  Int1 w0.254: v1(53.376,84.651) 53.376,59.487 59.376,53.487 60.305,53.487 61.244,54.426 70.738,54.426 73.533,51.631 v1(73.533,51.435)
Digi_1_5V_in: *.1 Q3.1 R5.2 | length 72.2
  Top Layer w0.254: Q3.1 32.713,50.216 R5.2
  Bottom Layer w0.254: Q3.1 32.585,60.906 37.968,66.289 42.199,66.289 57.317,81.407 59.65,81.407 60.92,80.137 79.995,80.137 81.392,81.534 *.1
Digi_2_5V_in: *1.1 Q4.1 R6.2 | length 61.3
  Top Layer w0.254: R6.2 30.988,46.039 Q4.1
  Bottom Layer w0.254: Q4.1 30.988,60.027 37.758,66.797 41.989,66.797 48.579,73.388 48.579,80.615 45.743,83.452 45.743,86.139 42.433,89.449 *1.1
Digi_in_1: Conn1.30 R29.1 | length 38.7
  Top Layer w0.254: v1(33.02,36.195) 33.02,44.507 36.368,47.855 R29.1
  Bottom Layer w0.254: v1(33.02,36.195) 34.861,34.354 42.28,34.354 43.203,33.431 43.203,32.732 44.126,31.809 44.825,31.809 45.726,30.909 45.726,30.21 46.582,29.354 53.419,29.354 Conn1.30
Digi_in_2: Conn1.31 R30.1 | length 43.8
  Top Layer w0.254: R30.1 27.04,40.27 v1(31.115,36.195)
  Bottom Layer w0.254: v1(31.115,36.195) 31.378,36.195 40.719,26.854 55.018,26.854 55.915,27.751 55.915,29.35 Conn1.31
GND: 3,3V.1 5V.1 *1.4 *.4 C1.1 C2.1 C3.1 C4.1 C5.1 C6.1 C7.2 C8.2 C9.2 C10.1 C11.1 C12.2 C13.2 C14.1 C15.1 C16.1 C17.1 C18.2 C19.1 C20.1 C21.1 C22.2 C23.1 C24.1 C25.1 C26.1 C27.1 C28.1 CCTRL.1 Conn1.11 Conn1.13 Conn1.14 Conn1.15 Conn1.16 Conn1.17 Conn1.18 Conn1.19 Conn1.23 Conn1.35 Conn1.47 Foult.1 Heart.1 JTAG.2 JTAG.10 Q2.3 Q3.3 Q4.3 R12.1 R14.1 R16.1 R18.1 R20.1 R22.1 R24.1 R27.1 R28.1 TK1.1 TK5.1 U1.22 U1.53 U1.63 U2.2 U2.4 U3.2 U4.2 U5.3 U6.11 U7.1 U8.1 | length 13.6
  Top Layer w0.254: U6.11 37.472,73.368 38.229,73.368 38.616,72.981 38.616,68.816 38.939,68.493 C23.1 ; v1(40.957,69.787) 40.957,69.512 41.156,69.313 41.156,68.856 41.479,68.533 C21.1 ; C9.2 64.98,91.191 65.786,90.385 v2(65.786,90.278) ; U1.53 65.805,88.919 65.805,90.259 v2@65.824,90.278 ; v1(73.533,73.683) 73.559,73.658 73.559,72.667 74.498,71.728 C14.1
  other v1: 27,27 30,27 33,27 36,27 39,27 66,27 75,27 78,27 81,27 84,27 28.5,30 34.5,30 76.5,30 79.5,30 85.5,30 27,33 75,33 78,33 28.5,36 82.5,36 85.5,36 30,39 51,39 75,39 78,39 81,39 84,39 28.5,42 31.5,42 79.5,42 82.5,42 85.5,42 45,45 84,45 28.5,48 85.5,48 27,51 42,51 45,51 82.5,54 46.482,56.388 63,57 28.5,60 85.5,60 27,63 31.5,66 49.5,66 85.5,66 63.948,67.96 27,69 33,69 48,69 51,69 28.5,72 85.5,72 27,75 81,75 46.5,78 82.5,78 85.5,78 79.5,84 27,87 78,87 28.5,90 34.5,90 46.5,90 76.5,90 79.5,90
  other v2: 51.181,51.689 44.469,52.851
JTAG_TCK: JTAG.1 SW1.3 U1.57 | length 85.3
  Top Layer w0.254: v1(27.432,80.264) 27.432,83.947 JTAG.1 ; v1(54.61,59.817) 54.737,59.69 54.737,57.235 SW1.3 ; U1.57 62.611,88.888 62.611,87.018 66.675,82.954 v1(66.675,81.407)
  Int2 w0.254: v1(27.432,80.264) 27.432,76.172 42.898,60.706 53.721,60.706 v1(54.61,59.817) 58.42,59.817 65.151,66.548 65.151,79.883 v1(66.675,81.407)
JTAG_TDI: JTAG.9 U1.54 | length 50.9
  Top Layer w0.254: U1.54 65.036,87.9 66.068,86.868 v1(68.961,86.868)
  Int2 w0.254: JTAG.9 30.923,77.278 34.82,77.278 37.374,79.832 56.932,79.832 59.777,82.677 67.052,82.677 69.088,84.713 69.088,86.741 v1(68.961,86.868)
JTAG_TDO: JTAG.3 U1.55 | length 50
  Top Layer w0.254: U1.55 64.223,87.88 66.505,85.598 v1(68.072,85.598)
  Int2 w0.254: JTAG.3 30.545,84.52 36.336,84.52 40.516,80.34 56.721,80.34 59.567,83.185 66.842,83.185 68.072,84.415 v1(68.072,85.598) v1@67.691,85.217
JTAG_TMS: JTAG.5 U1.56 | length 55
  Top Layer w0.254: U1.56 63.436,87.694 v1(66.675,84.455)
  Int2 w0.254: JTAG.5 28.194,82.169 28.194,86.741 28.702,87.249 34.325,87.249 40.727,80.848 56.464,80.848 60.071,84.455 v1(66.675,84.455)
"MISO _3,3V": U7.7
MISO_3,3V: R3.1 U8.7 | length 14
  Top Layer w0.254: U8.7 69.777,50.964 70.477,51.664 70.477,51.876 71.048,52.447 72.226,52.447 72.487,52.708 72.487,58.87 69.85,61.507 R3.1
MISO_5V: *1.6 *.6 Q2.1 R2.2 U1.13 | length 79.5
  Top Layer w0.254: *1.6 48.753,84.369 47.264,82.88 47.264,81.212 50.803,77.673 U1.13 55.537,77.8 56.762,77.8 v1(57.575,78.613) ; Q2.1 65.389,60.435 65.389,60.424 66.268,59.545 66.324,59.545 67.525,58.344 R2.2
  Bottom Layer w0.254: *1.6 50.053,84.369 50.983,83.439 67.35,83.439 70.525,86.614 *.6 ; v1(57.575,78.613) 57.741,78.613 58.376,79.248 62.387,79.248 65.054,76.581 68.957,76.581 71.882,73.656 71.882,69.797 65.389,63.304 65.389,61.231 Q2.1
Net3,3V_2: 3,3V.2 R31.2 | length 2
  Top Layer w0.254: R31.2 81.306,57.684 82.169,58.547
Net5V_2: 5V.2 R8.2 | length 2.4
  Top Layer w0.254: R8.2 26.936,55.614 28.853,55.614 5V.2
Net*1_2: *1.2 C27.2 Q6.1 | length 6.3
  Top Layer w0.254: C27.2 38.202,89.997 Q6.1 38.948,86.909 *1.2
Net*1_3: *1.3 C28.2 Q6.2 | length 6.3
  Top Layer w0.254: C28.2 38.18,83.633 38.916,84.369 *1.3
Net*_2: *.2 C25.2 Q5.1 | length 6.5
  Top Layer w0.254: *.2 84.75,84.074 85.623,83.201 Q5.1 85.798,82.915 C25.2
Net*_3: *.3 C26.2 Q5.2 | length 6.3
  Top Layer w0.254: *.3 85.147,86.614 85.798,87.265 C26.2
NetC1_2: C1.2 Q1.2 U1.23 | length 7.1
  Top Layer w0.254: C1.2 Q1.2 60.23,71.231 60.886,71.887 61.18,71.887 61.836,72.542 U1.23
NetC2_2: C2.2 Q1.1 U1.24 | length 7.1
  Top Layer w0.254: U1.24 62.623,72.542 63.318,71.847 63.535,71.847 64.23,71.152 Q1.1 C2.2
NetC9_1: C9.1 R1.1 U1.62 | length 21
  Top Layer w0.254: v1(58.568,86.717) 58.602,86.751 58.602,88.867 U1.62 ; R1.1 60.787,92.617 61.143,92.973 62.909,92.973 C9.1@63.63,92.252 ; C9.1 C9.1@63.63,92.252 ; v1(66.929,92.329) 66.175,93.083 64.372,93.083 64.149,92.86 64.149,92.771 C9.1@63.63,92.252
  Int1 w0.254: v1(58.568,86.717) 64.18,92.329 v1(66.929,92.329)
NetC12_1: C12.1 R9.2 R10.2 R11.1 | length 10.4
  Top Layer w0.254: R10.2 69.866,63.412 73.849,59.428 73.972,59.428 74.295,59.105 74.295,58.174 73.914,57.793 73.914,57.034 R11.1 73.903,55.147 C12.1
NetC20_2: C20.2 R15.1 SW2.9 U6.3 | length 28.4
  Top Layer w0.254: U6.3 43.046,72.718 42.289,72.718 41.928,72.357 41.928,70.971 43.053,69.846 43.053,67.375 43.202,67.227 44.025,67.227 C20.2 ; v1(43.159,61.883) 43.353,62.077 43.353,62.443 44.323,63.413 SW2.9 ; C20.2@44.119,67.183 48.725,62.577 48.725,61.929 R15.1 49.164,61.722 v1(50.927,61.722)
  Int2 w0.254: v1(43.159,61.883) 43.434,61.883 43.848,61.468 47.123,61.468 47.377,61.722 v1(50.927,61.722)
NetC21_2: C21.2 R17.1 SW2.11 U6.5 | length 26.4
  Top Layer w0.254: R17.1 32.416,61.067 v1(34.183,61.067) ; v1(41.402,60.071) 41.402,62.187 41.622,62.406 41.622,67.09 C21.2 42.396,67.183 42.545,67.332 42.545,69.636 41.42,70.761 41.42,73.149 42.289,74.018 43.046,74.018 U6.5
  Int1 w0.254: v1(34.183,61.067) 35.179,60.071 v1(41.402,60.071)
NetC23_2: C23.2 R19.1 SW2.13 U6.10 | length 23
  Top Layer w0.254: U6.10 37.472,74.018 38.297,74.018 39.87,72.445 39.87,67.292 39.721,67.143 C23.2 39.039,67.143 39.362,66.82 39.362,64.288 39.226,64.152 39.353,64.025 39.353,62.77 v1(39.336,62.753) ; v1(44.831,62.484) 44.958,62.611 47.083,62.611 47.232,62.462 47.232,61.618 R19.1
  Int1 w0.254: v1(39.336,62.753) 39.481,62.899 44.142,62.899 44.556,62.484 v1(44.831,62.484)
NetC24_2: C24.2 R21.1 SW2.15 U6.12 | length 20.8
  Top Layer w0.254: R21.1 30.327,62.331 v1(34.671,66.675) 34.946,66.675 35.414,67.143 C24.2 36.542,67.109 SW2.15@36.542,64.247 ; v1(34.798,72.517) 35.073,72.517 35.312,72.756 U6.12
  Int1 w0.254: v1(34.671,66.675) 34.734,66.739 34.734,72.453 v1(34.798,72.517)
NetCCTRL1_2: CCTRL.2 R12.2 U4.8 | length 6.1
  Top Layer w0.254: R12.2 77.47,61.722 77.089,62.103 U4.8 77.191,63.424 77.241,63.373 77.749,63.373 78.715,64.338 78.715,64.828 79.038,65.151 CCTRL.2
NetConn1_1: Conn1.1 F1.2 | length 6.2
  Top Layer w0.254: F1.2 42.05,41.681 Conn1.1
NetConn1_2: Conn1.2 F2.2 | length 6.2
  Top Layer w0.254: Conn1.2 44.55,41.667 F2.2
NetConn1_3: Conn1.3 F3.2 | length 6.2
  Top Layer w0.254: Conn1.3 47.05,41.589 F3.2
NetConn1_4: Conn1.4 F4.2 | length 6.2
  Top Layer w0.254: Conn1.4 49.55,41.505 F4.2
NetConn1_5: Conn1.5 F5.2 | length 6.1
  Top Layer w0.254: Conn1.5 52.05,41.592 F5.2
NetConn1_6: Conn1.6 F6.2 | length 6.2
  Top Layer w0.254: Conn1.6 54.55,41.552 F6.2
NetConn1_7: Conn1.7 F8.2 | length 8.4
  Top Layer w0.254: Conn1.7 62.116,40.551 62.116,41.244 F8.2
NetConn1_37: Conn1.37 F14.1 | length 16.8
  Top Layer w0.254: F14.1 34.417,41.562 36.449,39.53 36.449,37.801 37.131,37.119 37.131,32.904 Conn1.37
NetConn1_38: Conn1.38 F13.1 | length 17.8
  Top Layer w0.254: F13.1 36.957,38.012 37.639,37.33 37.639,33.297 41.582,29.354 43.181,29.354 Conn1.38
NetConn1_39: Conn1.39 F12.1 | length 18.2
  Top Layer w0.254: F12.1 39.497,33.939 41.582,31.854 42.28,31.854 43.29,30.845 43.29,30.146 44.299,29.136 45.899,29.136 Conn1.39
NetConn1_40: Conn1.40 F11.1 | length 26.4
  Top Layer w0.254: Conn1.40 50.681,26.854 52.518,26.854 53.374,27.71 53.374,28.409 54.256,29.291 54.955,29.291 55.828,30.163 55.828,30.862 56.725,31.759 57.424,31.759 58.307,32.643 58.307,33.342 59.264,34.298 59.963,34.298 60.919,35.255 60.919,35.953 63.539,38.573 64.703,38.573 67.691,41.562 F11.1
NetConn1_41: Conn1.41 F10.1 | length 20.5
  Top Layer w0.254: Conn1.41 53.238,29.173 53.238,30.772 54.196,31.731 54.895,31.731 55.841,32.676 55.841,33.375 56.78,34.315 57.479,34.315 58.419,35.255 58.419,35.953 63.659,41.193 64.783,41.193 65.151,41.562 F10.1
NetConn1_42: Conn1.42 F9.1 | length 15.8
  Top Layer w0.254: v1(57.023,37.592) 59.817,40.386 F9.1
  Int1 w0.254: Conn1.42 55.809,29.244 55.809,36.378 v1(57.023,37.592)
NetConn1_43: Conn1.43 F7.1 | length 14.6
  Top Layer w0.254: v1(57.15,39.751) 57.15,41.529 F7.1
  Int1 w0.254: Conn1.43 58.181,29.116 58.181,38.72 v1(57.15,39.751)
NetFoult_2: Foult.2 R4.2 | length 1.7
  Top Layer w0.254: R4.2 81.762,70.638 Foult.2
NetHeart_2: Heart.2 R7.2 | length 1.8
  Top Layer w0.254: R7.2 83.569,72.397 Heart.2
NetQ2_2: Q2.2 R3.2 | length 4
  Top Layer w0.254: Q2.2 66.261,60.822 67.326,59.757 R3.2
NetQ3_2: Q3.2 R29.2 | length 2.8
  Top Layer w0.254: Q3.2 33.855,50.332 34.617,49.57 R29.2
NetQ4_2: Q4.2 R30.2 | length 2.9
  Top Layer w0.254: R30.2 28.89,46.05 29.718,45.222 Q4.2
NetR4_1: R4.1 U1.35 | length 12.5
  Top Layer w0.254: U1.35 74.689,76.886 77.984,73.591 R4.1
NetR7_1: R7.1 U1.37 | length 15.4
  Top Layer w0.254: U1.37 79.502,78.486 83.566,74.422 R7.1
NetR10_1: R10.1 U4.5 | length 1.7
  Top Layer w0.254: R10.1 71.628,63.424 U4.5
NetR14_2: R14.2 SW1.1 | length 2.7
  Top Layer w0.254: R14.2 52.441,54.565 SW1.1@52.441,56.911
NetR16_2: R16.2 SW2.7 | length 3.7
  Top Layer w0.254: SW2.7@43.18,56.657 43.18,55.641 43.621,55.2 44.368,55.2 44.808,54.76 44.808,54.101 R16.2
NetR18_2: R18.2 SW2.5 | length 2.8
  Top Layer w0.254: SW2.5@40.352,56.657 40.883,56.126 R18.2
NetR20_2: R20.2 SW2.3 | length 3.1
  Top Layer w0.254: SW2.3@37.812,56.657 37.812,55.099 38.833,54.078 R20.2
NetR22_2: R22.2 SW2.1 | length 2.6
  Top Layer w0.254: R22.2 35.272,54.17 SW2.1@35.272,56.657
NetR23_1: R23.1 R24.2 TK2.1 U7.6 | length 6.5
  Top Layer w0.254: TK2.1 49.856,51.151 R23.1 ; R24.2 49.856,47.359 R23.1 ; U7.6 51.686,49.509 51.332,49.156 R23.1
NetR25_1: R25.1 R27.2 TK6.1 U8.6 | length 6.4
  Top Layer w0.254: U8.6 71.625,49.694 71.656,49.725 R27.2 ; TK6.1 71.433,49.439 R25.1@71.688,49.694
NetSW1_4: SW1.4 U1.27 | length 25.4
  Top Layer w0.254: SW1.4 56.134,57.222 56.134,58.166 59.294,61.326 61.019,61.326 68.886,69.192 68.886,70.508 68.314,71.079 66.671,71.079 65.059,72.691 65.059,73.638 U1.27
NetSW1_5: SW1.5 U1.28 | length 24.4
  Top Layer w0.254: SW1.5 57.404,57.222 57.404,58.039 60.183,60.818 61.23,60.818 69.394,68.982 69.394,70.718 68.525,71.587 67.18,71.587 65.951,72.816 65.951,73.533 U1.28
NetSW1_6: SW1.6 U1.29 | length 23.6
  Top Layer w0.254: SW1.6 58.674,57.222 58.674,58.069 60.915,60.31 61.44,60.31 69.902,68.771 69.902,70.929 68.735,72.095 67.459,72.095 66.763,72.791 66.763,73.533 U1.29
NetSW1_7: SW1.7 U1.32 | length 21.4
  Top Layer w0.254: SW1.7 59.944,57.222 59.944,58.095 70.41,68.561 70.41,71.139 69.024,72.525 U1.32
NetTK3_2: TK3.2 TK4.2 U7.4 | length 4.1
  Top Layer w0.254: TK4.2 TK3.2 57.943,52.609 U7.4
NetTK8_2: TK8.2 TK9.2 U8.4 | length 4
  Top Layer w0.254: U8.4 TK8.2 TK9.2
Reset_uC: JTAG.6 U1.20 U5.1 | length 32.6
  Top Layer w0.254: JTAG.6 33.401,79.502 43.326,79.502 50.705,72.123 U5.1 58.272,71.767 59.296,72.791 59.296,73.533 U1.20
RX_CAN: U1.31 U4.4 | length 10.8
  Top Layer w0.254: U1.31 68.364,73.787 68.364,74.529 68.612,74.778 69.628,74.778 70.365,74.041 70.779,74.041 73.437,71.383 73.437,69.808 73.279,69.651 U4.4
SCK_SPI_3,3V: R26.1 R28.2 TK7.1 U7.5 U8.5 | length 30.2
  Top Layer w0.254: U7.5 52.303,50.79 53.965,50.79 v1(53.975,50.8) ; R26.1 66.548,54.483 TK7.1 66.689,54.596 R28.2 69.462,54.596 69.723,54.335 69.723,54.169 70.277,53.615 70.277,53.451 v1(70.317,53.41) ; v1(66.929,49.53) 67.123,49.336 67.865,49.336 68.777,48.424 U8.5
  Int1 w0.254: v1(66.929,49.53) 66.929,49.761 70.317,53.149 v1(70.317,53.41)
  Int2 w0.254: v1(53.975,50.8) 54.142,50.8 54.777,51.435 65.024,51.435 v1(66.929,49.53)
SCK_SPI_5V: *1.7 *.7 R26.2 TK7.2 U1.11 | length 90.4
  Top Layer w0.254: *1.7 49.403,85.928 49.979,85.351 50.458,85.351 51.034,84.775 51.034,83.962 50.17,83.099 48.636,83.099 47.772,82.235 47.772,81.422 49.921,79.273 U1.11 56.798,79.273 57.154,79.629 57.995,79.629 59.164,78.46 59.146,78.442 v1(59.146,78.232) ; v1(63.881,58.801) 64.643,58.039 R26.2 ; R26.2@64.643,56.233 64.966,55.91 65.439,55.91 65.469,55.88 TK7.2
  Bottom Layer w0.254: *1.7 48.753,86.909 47.772,85.928 47.772,83.962 48.803,82.931 67.56,82.931 68.703,84.074 *.7 ; v1(59.146,78.232) 62.685,78.232 64.844,76.073 68.747,76.073 71.374,73.446 71.374,70.007 63.881,62.514 v1(63.881,58.801)
T+1: Conn1.20 U7.3 | length 23
  Top Layer w0.254: v1(56.007,50.419) 56.201,50.225 56.728,50.225 57.443,49.509 U7.3
  Bottom Layer w0.254: v1(56.007,50.419) 54.991,49.403 54.991,42.536 55.681,41.846 55.681,35.255 56.697,34.239 58.296,34.239 Conn1.20
T+2: Conn1.44 U8.3 | length 26.9
  Top Layer w0.254: U8.3 64.234,49.694 65.414,48.514 v1(65.532,48.514)
  Int1 w0.254: Conn1.44 60.716,29.151 62.316,29.151 63.214,30.05 63.214,30.749 64.098,31.633 64.797,31.633 65.681,32.517 65.681,48.365 v1(65.532,48.514)
T-1: Conn1.8 TK1.2 U7.2 | length 18.4
  Top Layer w0.254: v1(56.007,48.133) 56.06,48.186 57.89,48.186 U7.2 59.776,48.239 60.099,47.916 TK1.2
  Bottom Layer w0.254: v1(56.007,48.133) 59.55,44.59 Conn1.8
T-2: Conn1.32 TK5.2 U8.2 | length 27.6
  Top Layer w0.254: v1(61.321,53.066) 61.321,51.111 TK5.2 U8.2
  Bottom Layer w0.254: Conn1.32 60.681,31.616 60.681,52.269 61.321,52.909 v1(61.321,53.066)
TX_CAN: U1.30 U4.1 | length 20.7
  Top Layer w0.254: U1.30 67.43,73.667 67.43,77.59 v1(67.437,77.597) ; U4.1 77.089,71.607 77.597,72.115 v1(77.597,72.39)
  Int2 w0.254: v1(67.437,77.597) 72.39,77.597 v1(77.597,72.39)
pads on no net: Conn1.50 JTAG.8 SW1.8 SW1.9 U1.1 U1.6 U1.7 U1.8 U1.9 U1.10 U1.12 U1.14 U1.15 U1.16 U1.17 U1.18 U1.19 U1.25 U1.26 U1.33 U1.34 U1.36 U1.38 U1.39 U1.40 U1.41 U1.42 U1.43 U1.44 U1.45 U1.46 U1.47 U1.48 U1.49 U1.50 U1.51 U7.8 U8.8
copper on no net: | length 0.8
  Top Layer w0.254: 55.41,83.287 55.422,83.299 ; 64.179,73.704 64.223,73.66 ; 67.424,88.9 67.437,88.913 ; 70.65,84.074 70.777,83.947 ; 70.65,87.274 71.132,87.274

## Polygon pours and split planes (outlines as drawn)
+5V on Int2 "+5V_L03_P010" (solid, remove dead copper, pour order 10): 25.4,25.4 88.392,25.4 88.392,94.234 25.4,94.234
+12V on Int2 "+12V Bus" (solid, remove dead copper, pour order 8): 69.85,26.416 73.787,26.416 73.787,48.895 73.914,49.022 82.042,49.022 82.042,51.816 69.469,51.816 69.469,49.022 41.148,49.022 41.148,46.736 41.402,46.736 41.402,44.069 42.672,44.069 42.672,46.736 46.482,46.736 46.482,44.196 47.752,44.196 47.752,46.736 69.469,46.736 69.469,42.662 69.591,42.54 69.85,42.642
GND on Bottom Layer "GND_L04_P001" (solid, remove dead copper, pour order 1): 25.4,25.4 88.392,25.4 88.392,94.234 25.4,94.234
GND on Int1 "GND_L02_P002" (solid, remove dead copper, pour order 2): 25.4,25.4 88.392,25.4 88.392,94.234 25.4,94.234
GND on Top Layer "GND_L01_P004" (solid, remove dead copper, pour order 4): 25.4,25.4 88.392,25.4 88.392,94.234 25.4,94.234

## Other copper
Top Layer:
  pour cut-out: 86.614,63.119 88.392,63.119 88.392,67.945 86.614,67.945
  text "1" at 87.018,63.523 h1
Int1:
  pour cut-out: 86.614,63.119 88.392,63.119 88.392,67.945 86.614,67.945
  text "2" at 87.526,64.158 h1
Int2:
  pour cut-out: 86.614,63.094 88.392,63.094 88.392,67.92 86.614,67.92
  text "3" at 87.018,65.428 h1
Bottom Layer:
  pour cut-out: 86.614,63.094 88.392,63.094 88.392,67.92 86.614,67.92
  text "4" at 87.526,66.444 h1

## Silkscreen, mask and mechanical layers (free items; w line width, h text height)
Top Overlay:
  text "Links" at 26.416,91.724 h3
  text "Rechts" at 79.629,91.724 h3